# Altium PCB XPIAC_1V3.PCBDOC (part 1 of 4)
Units mil, origin at the board's own origin, x right, y up, seen from the top; angles counter-clockwise.
Board outline 2900 x 2135 mil, 6 copper layers (Top Layer, Internal Plane 1, Mid-Layer 1, Mid-Layer 2, Mid-Layer 3, Bottom Layer); 175 components, 110 nets, 675 pads, 395 vias.
Unrouted connection lines stored in the file: 142.
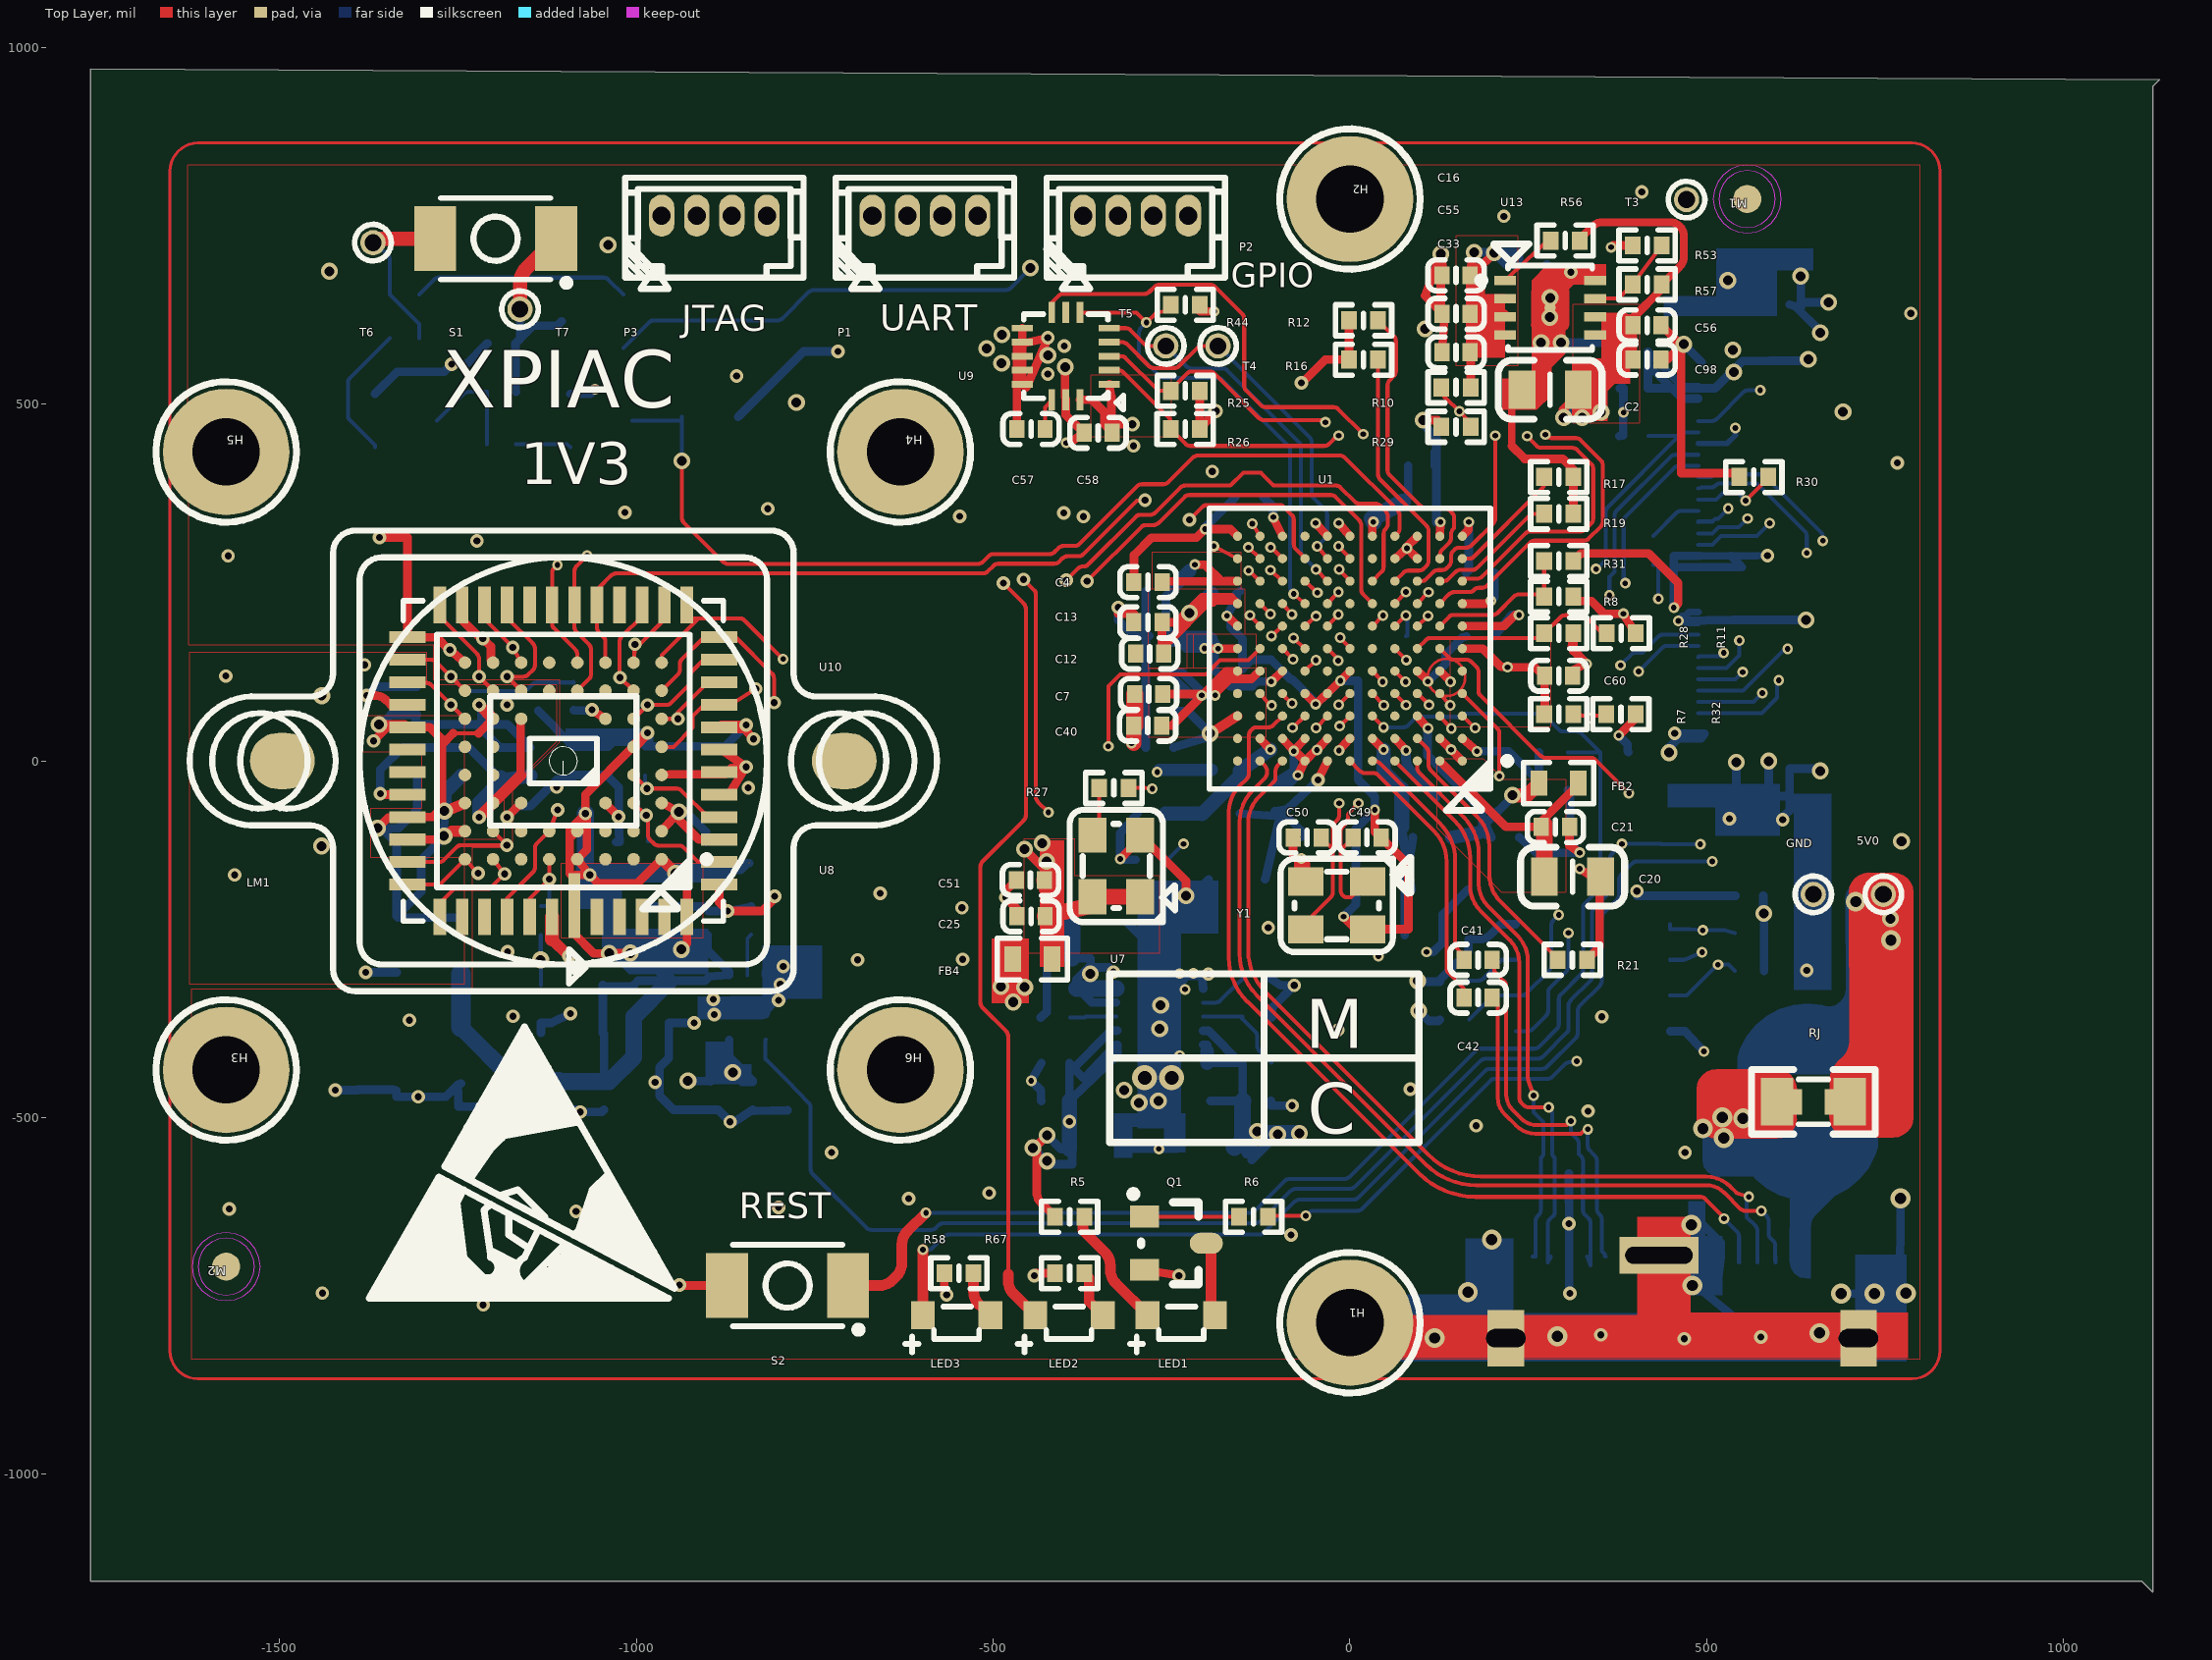
[diagram p0: Top Layer view]
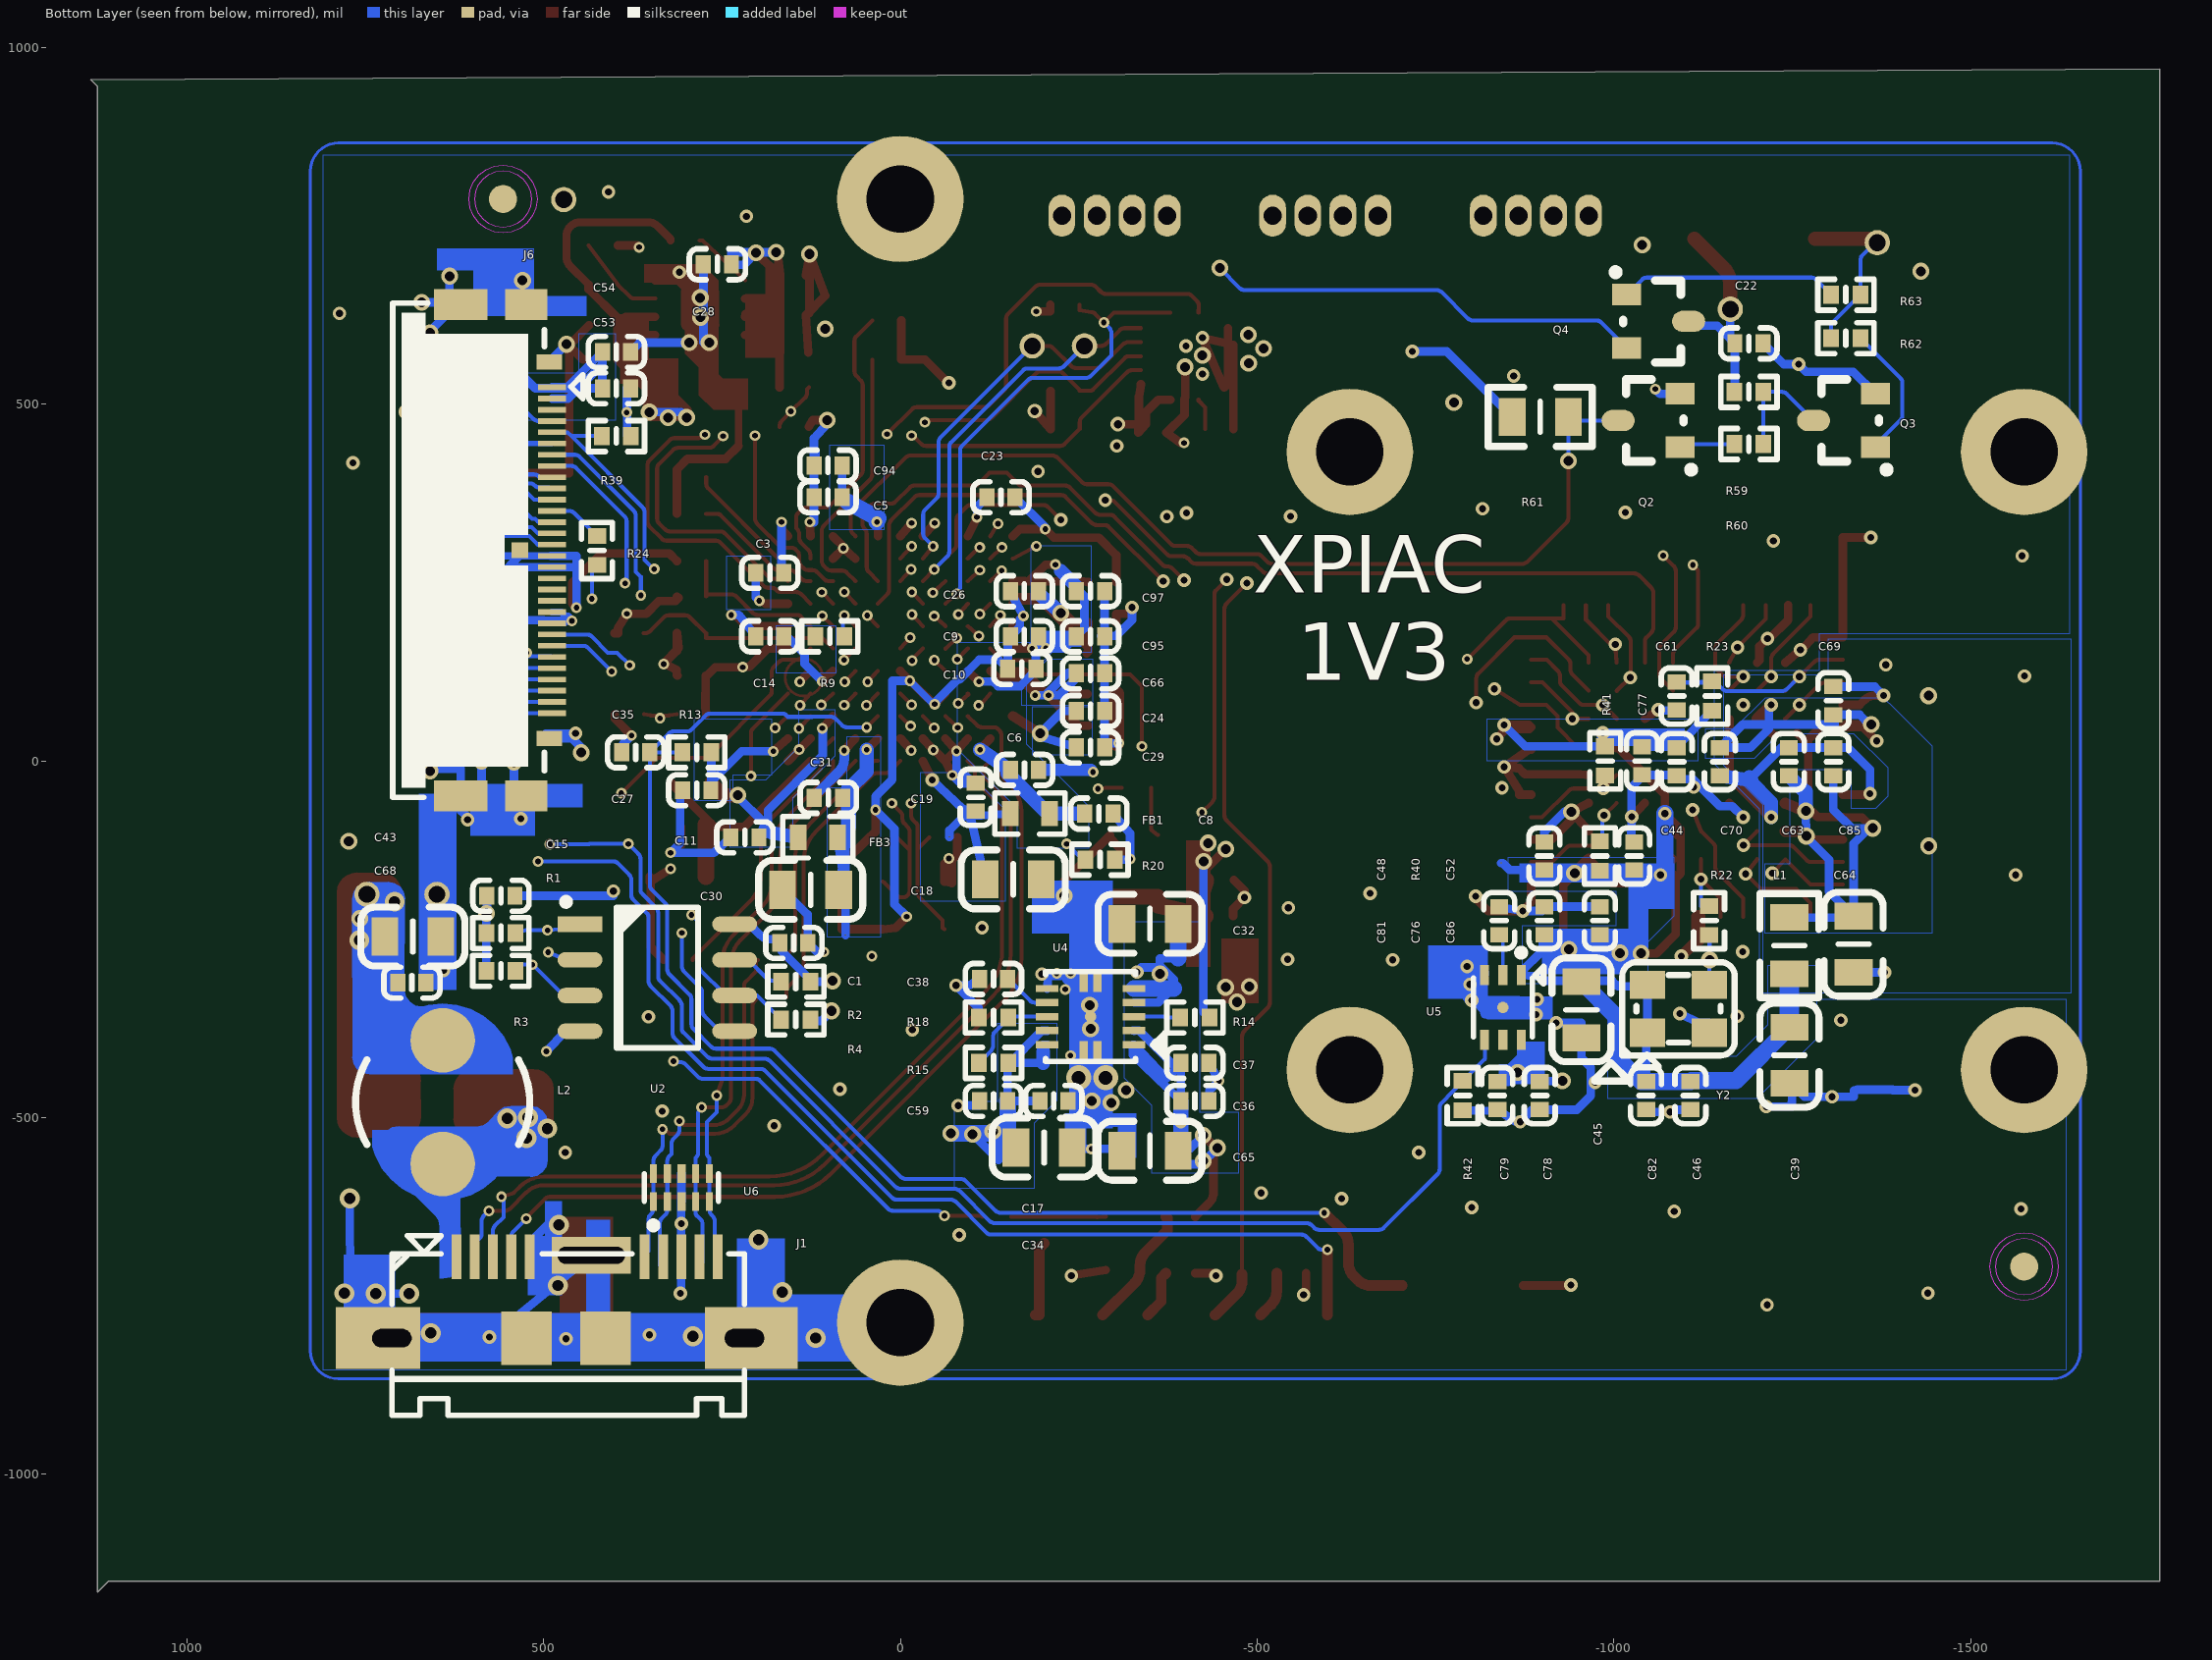
[diagram p1: Bottom Layer view, seen from below]
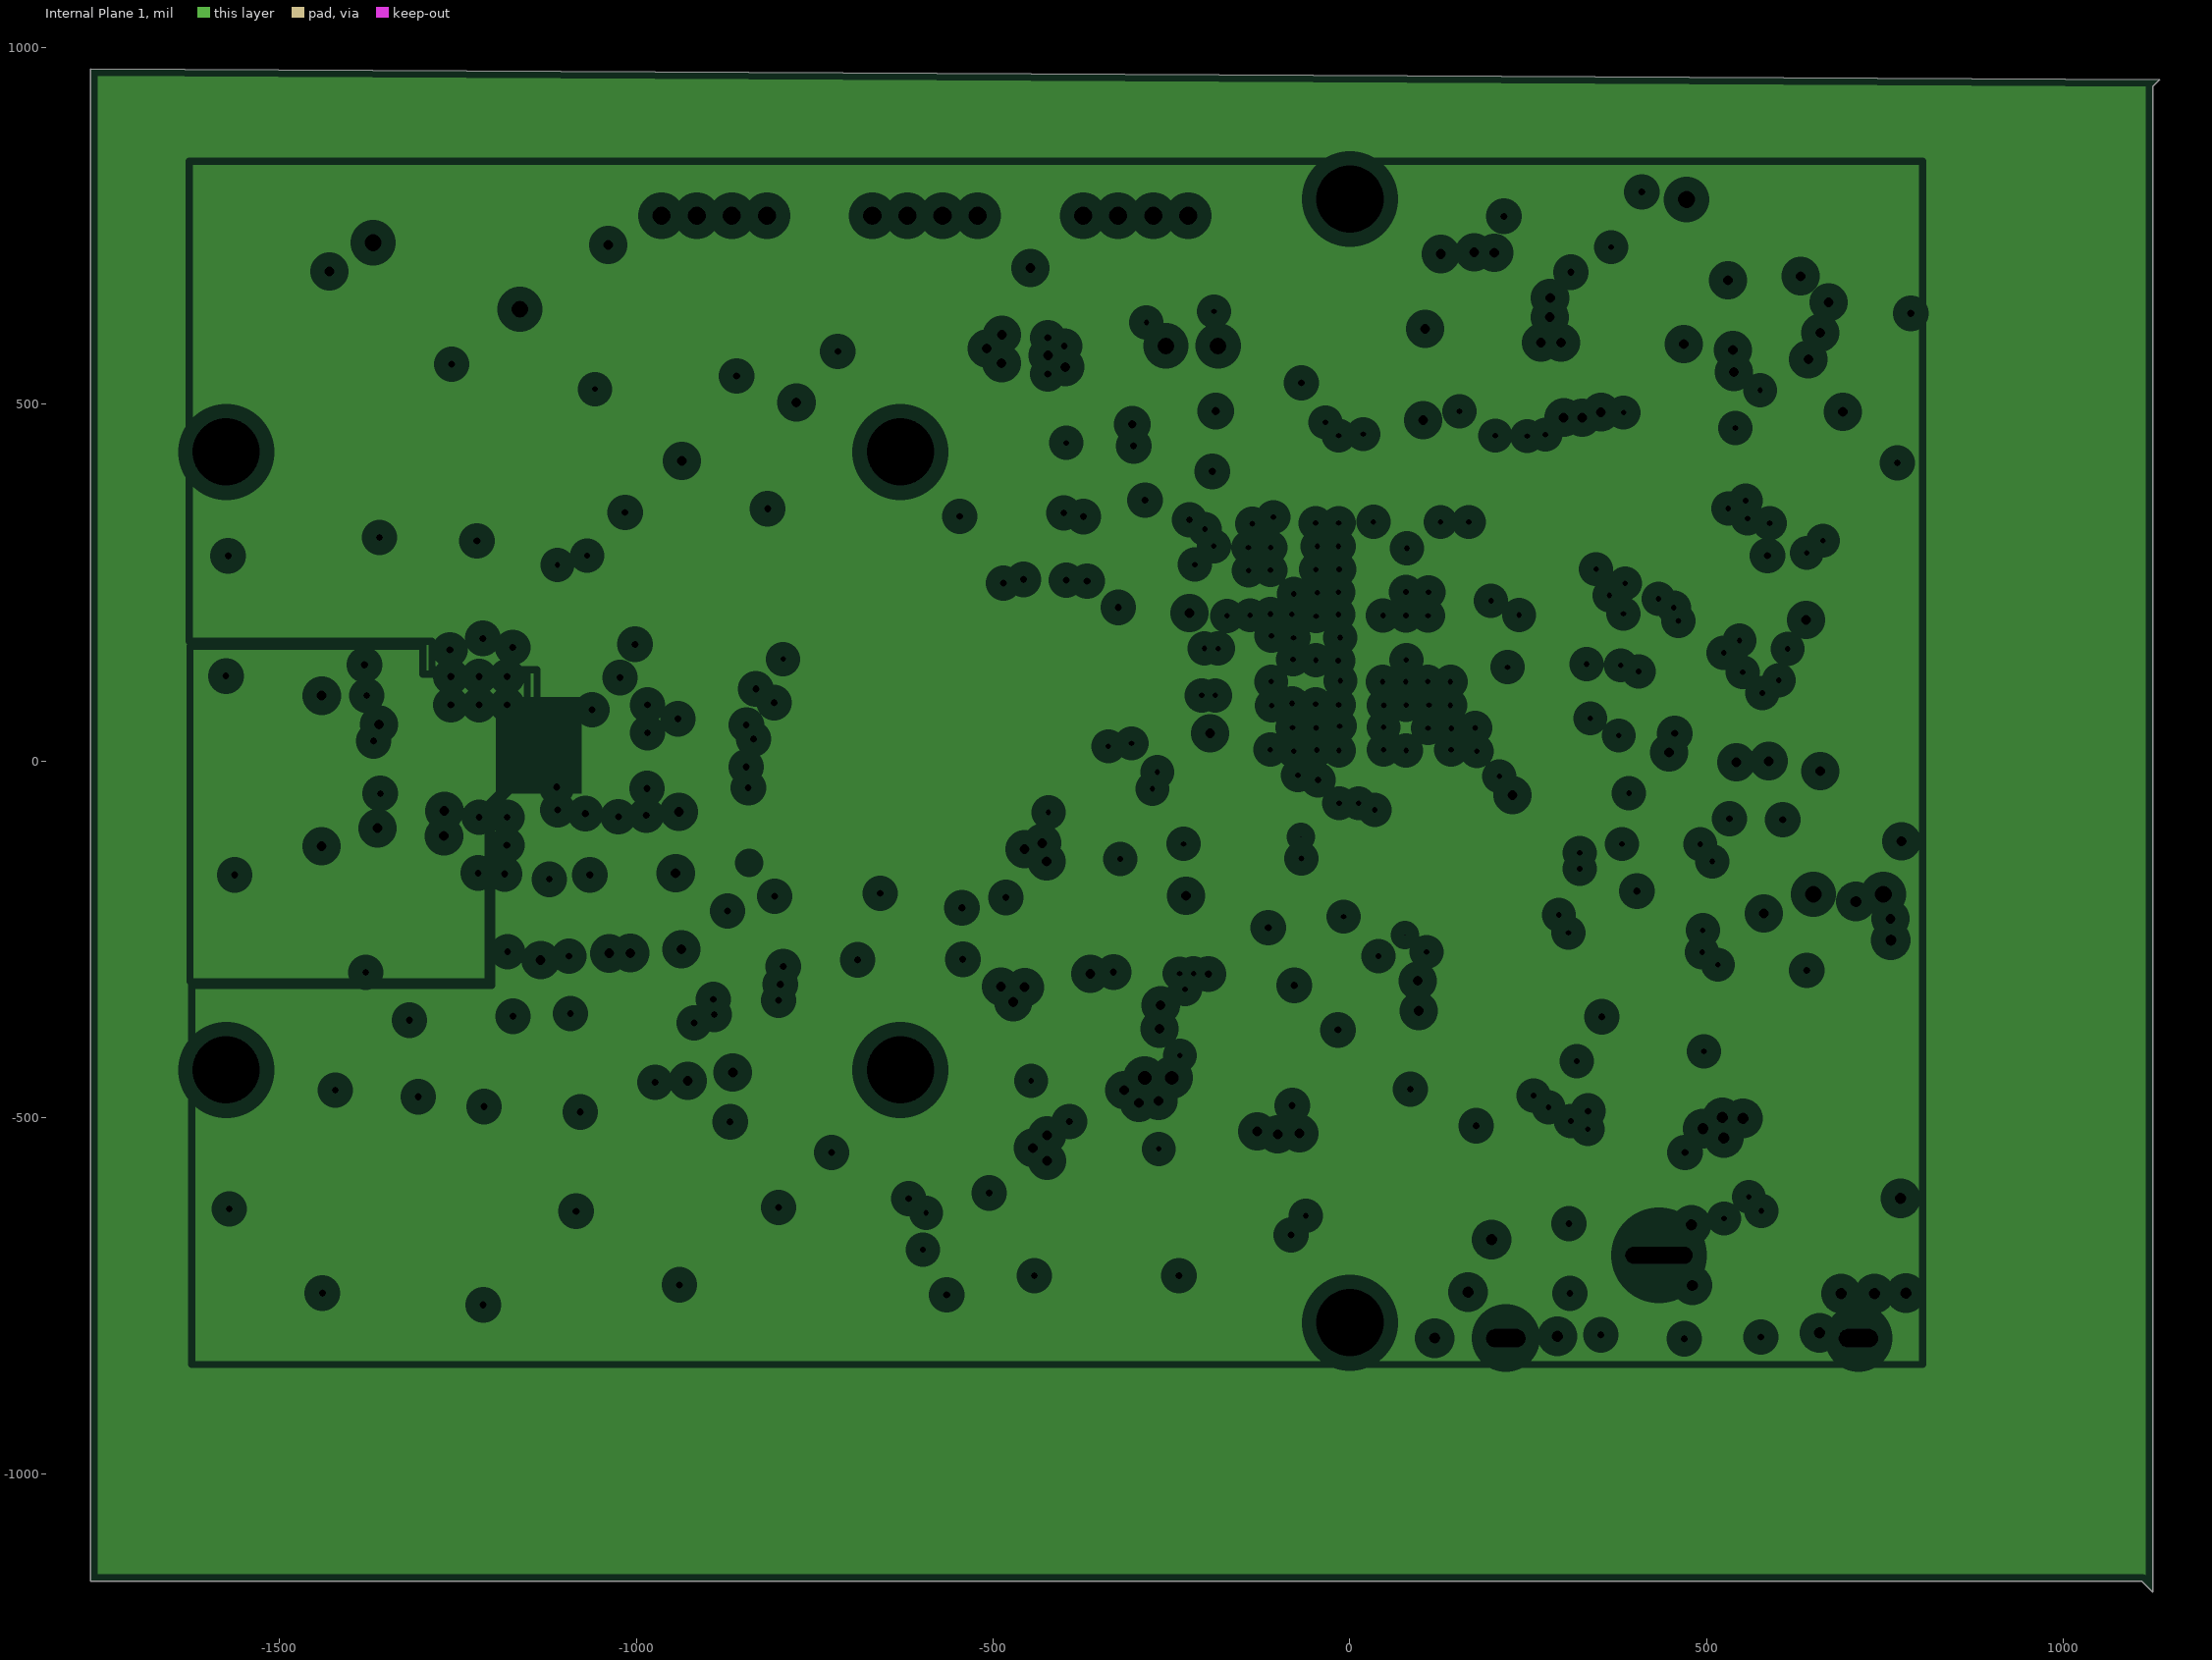
[diagram p2: Internal Plane 1, clearances drawn from the general rule]
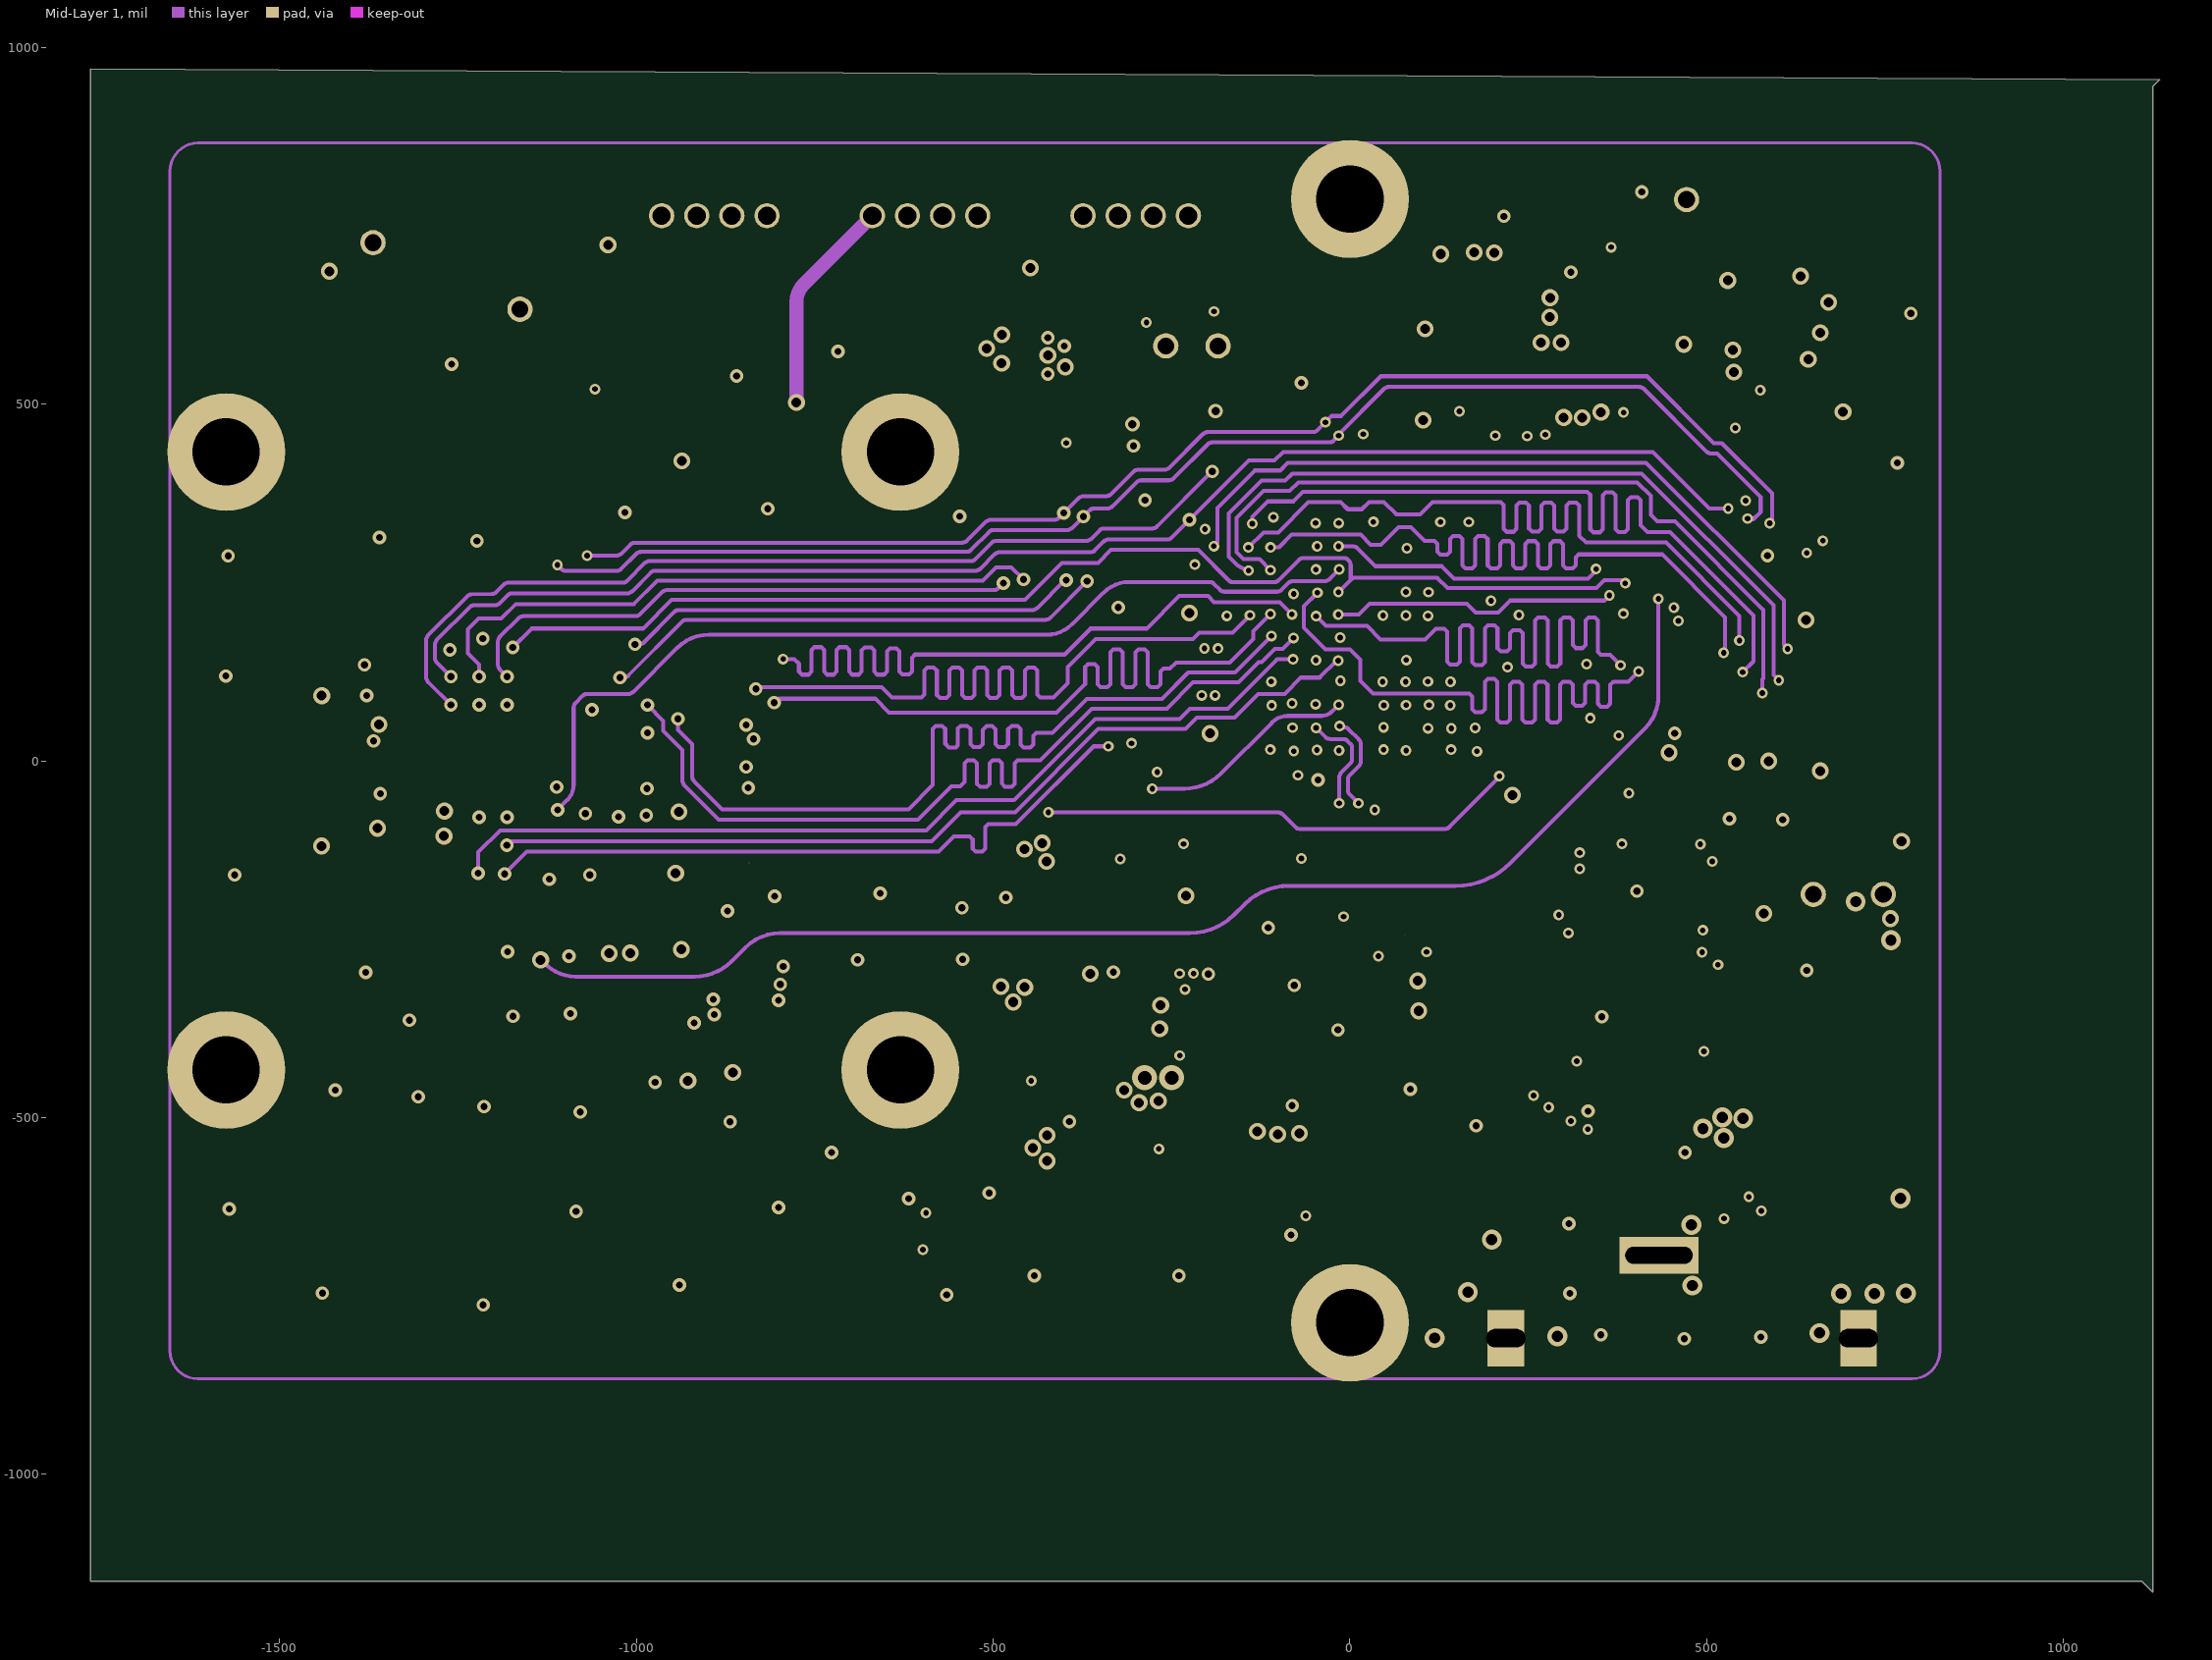
[diagram p3: Mid-Layer 1]
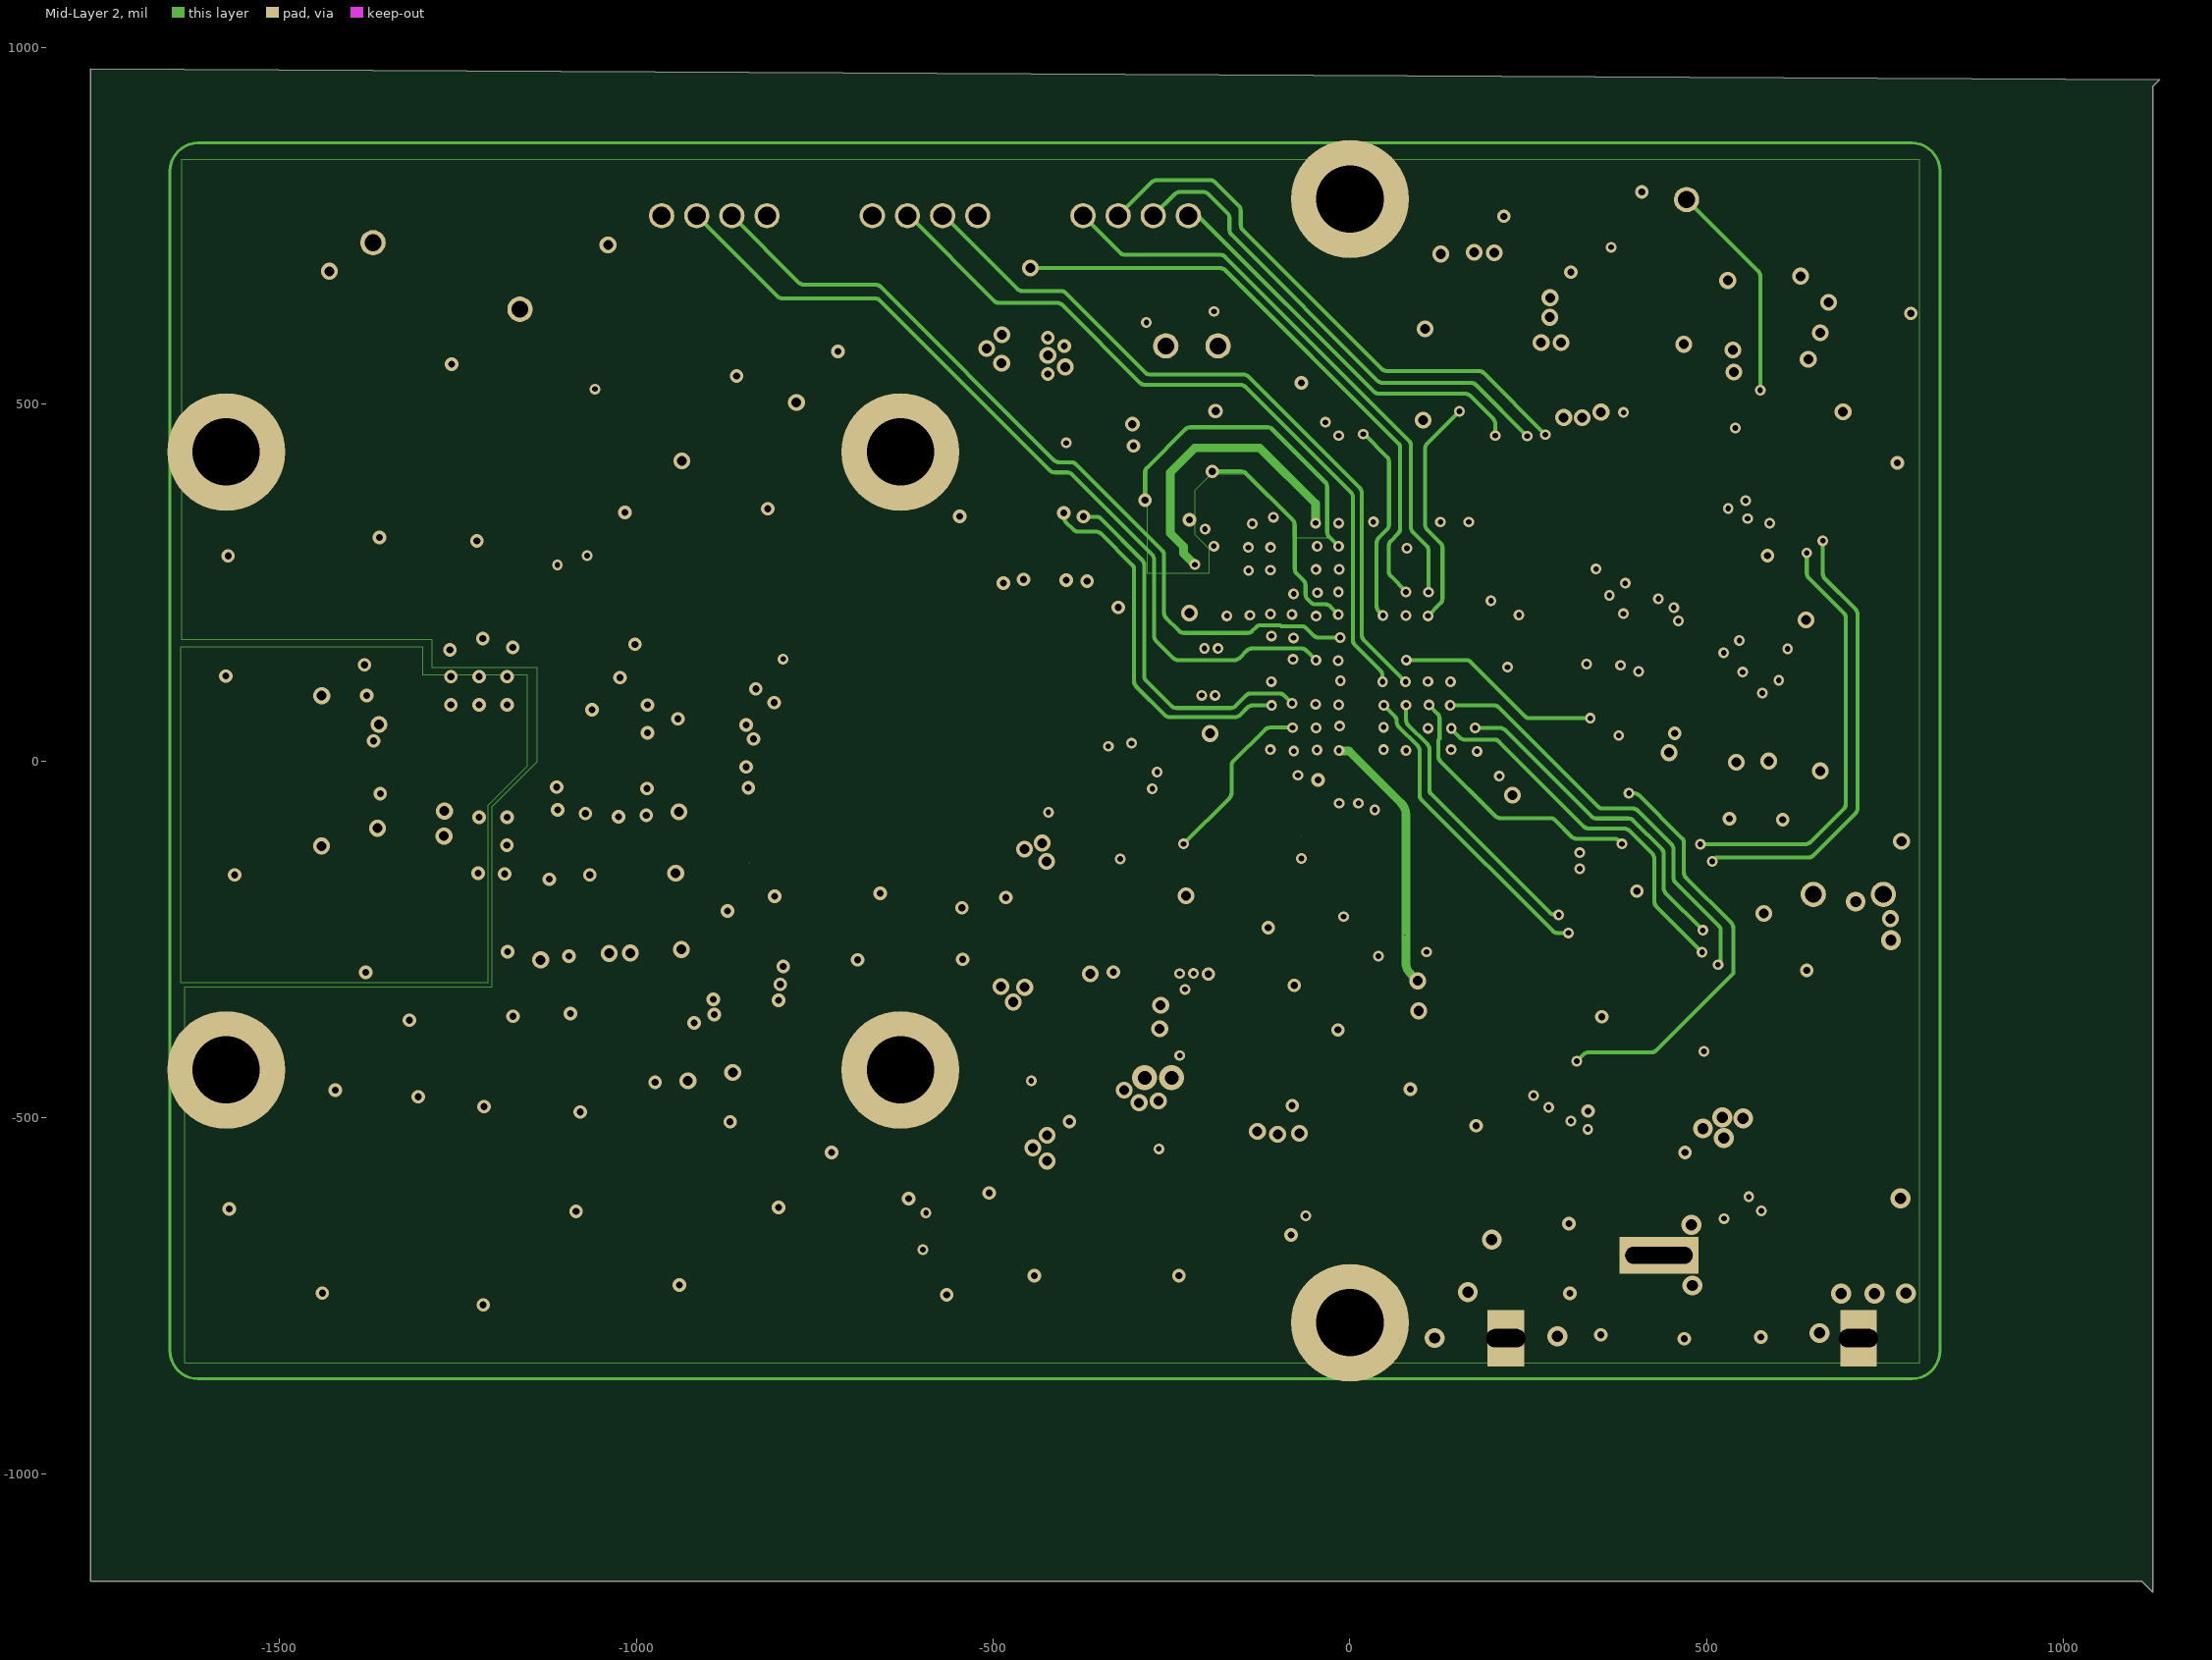
[diagram p4: Mid-Layer 2]
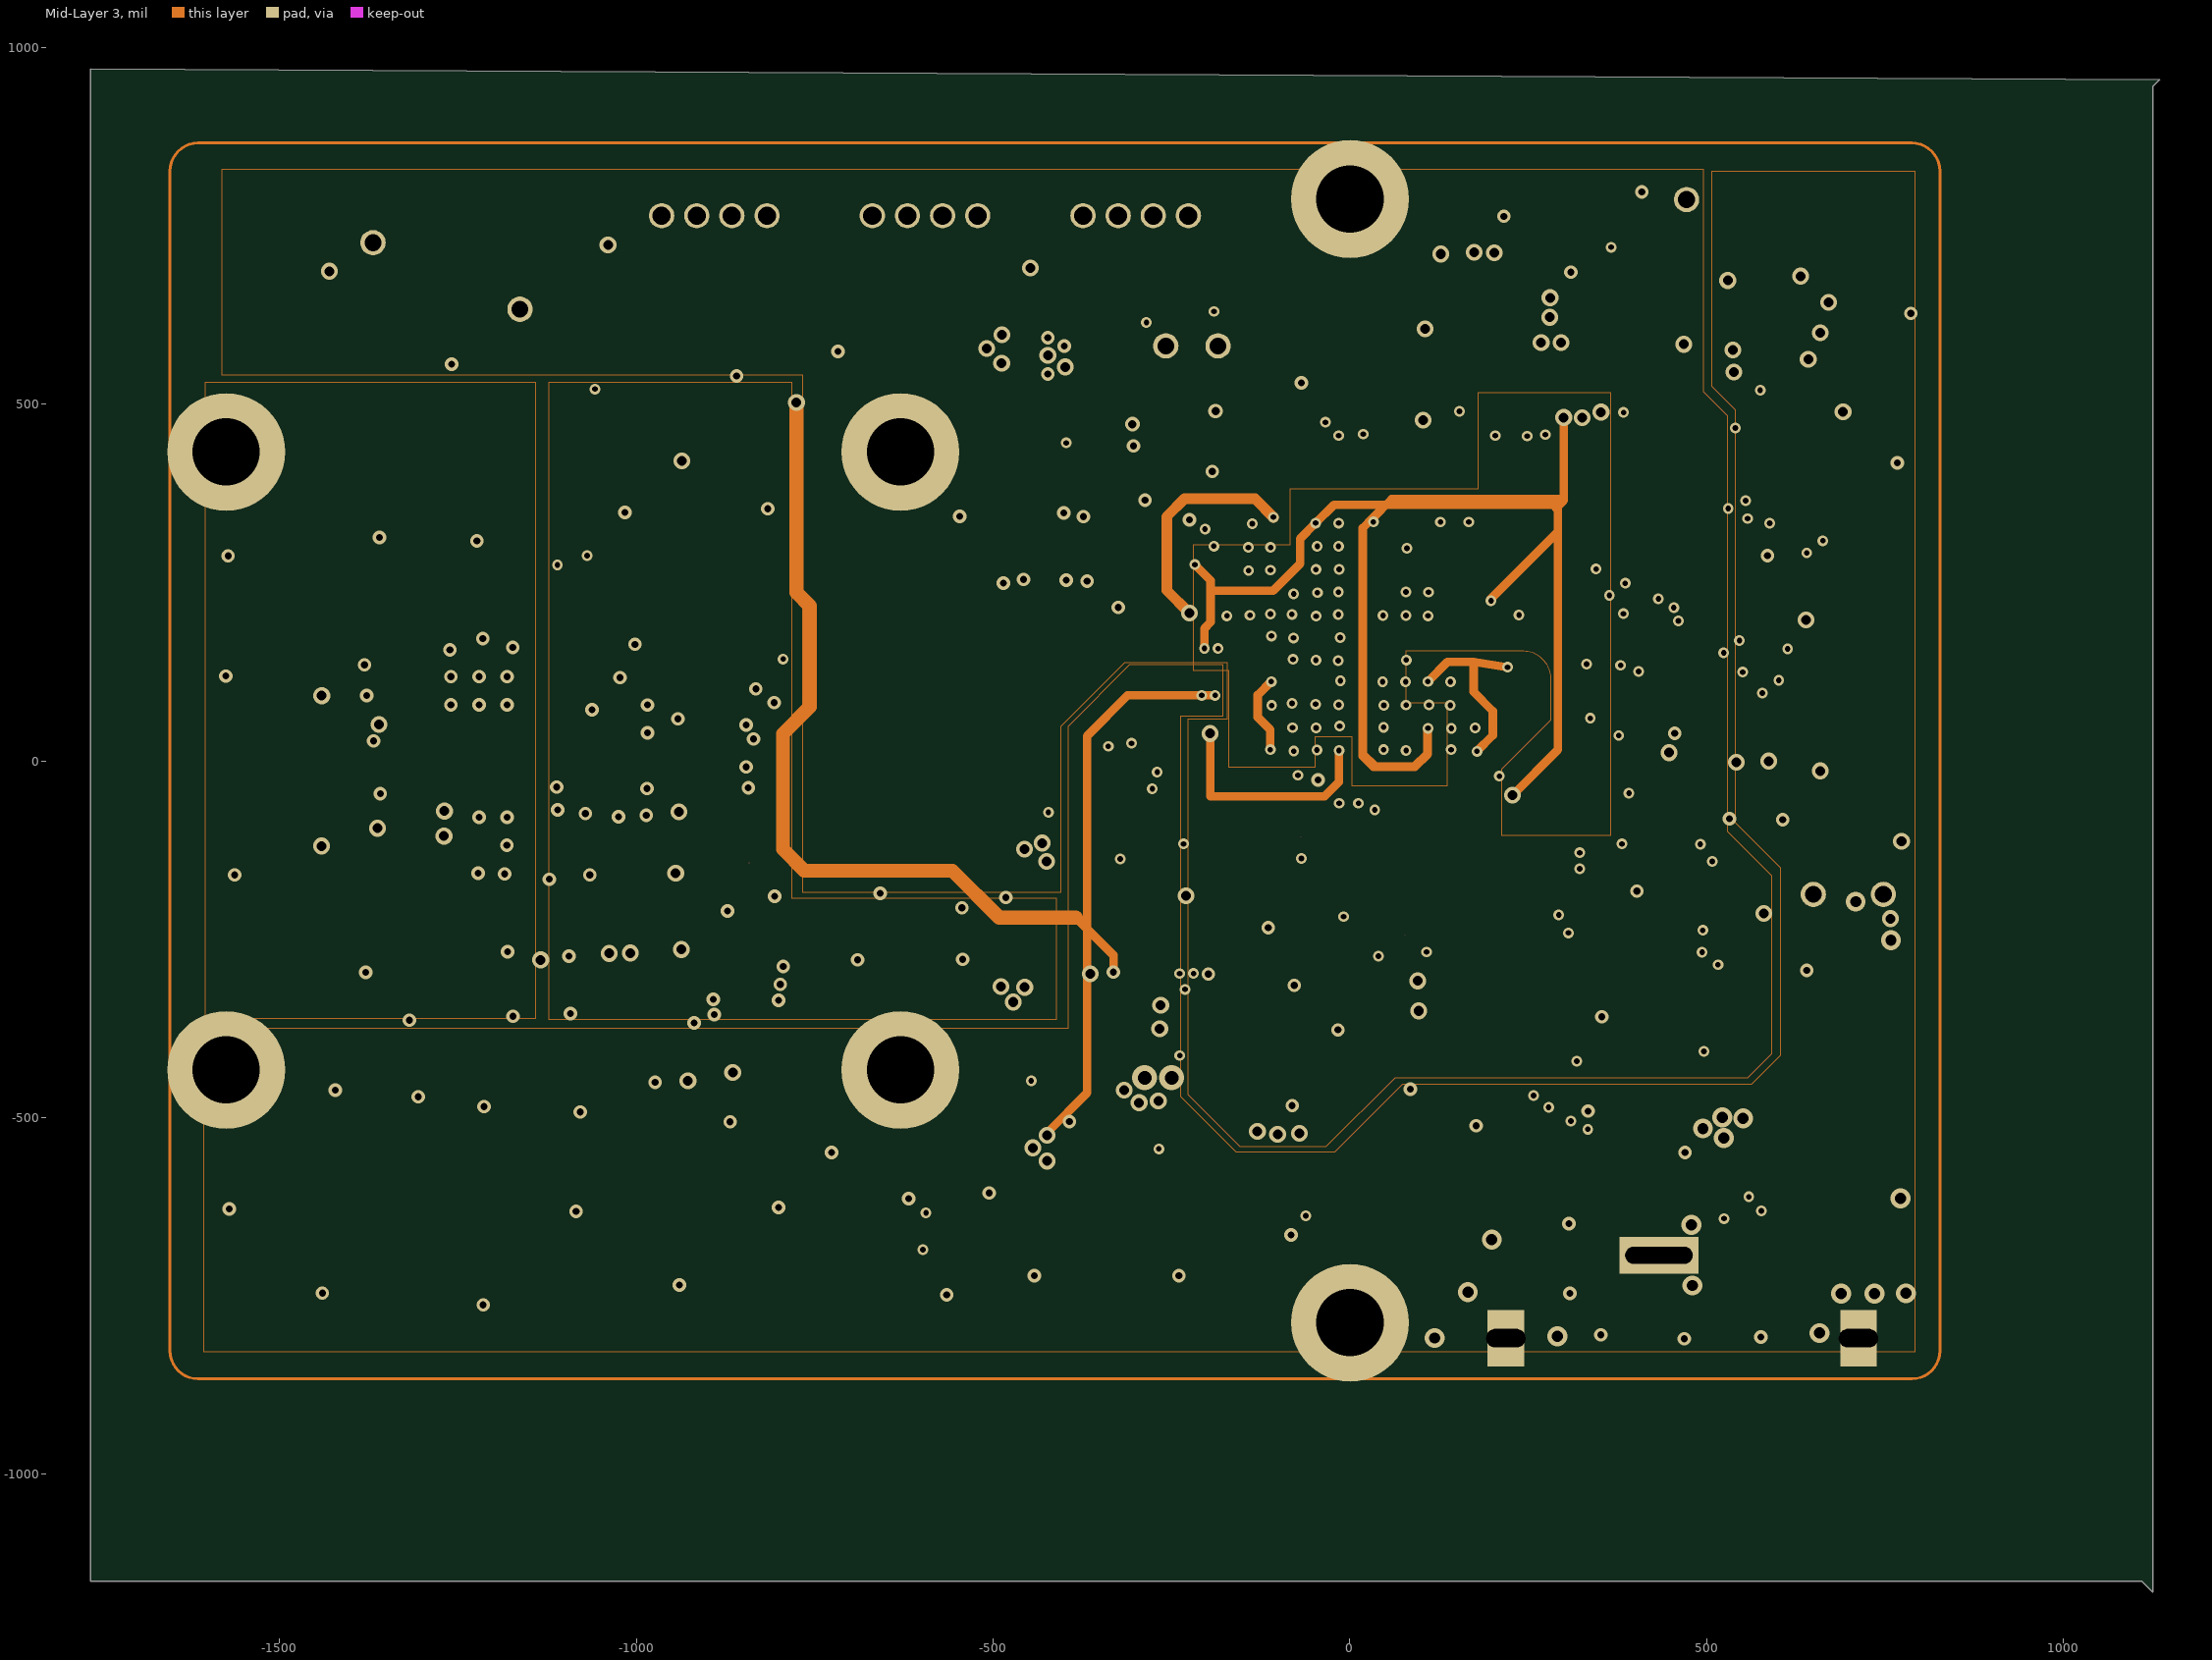
[diagram p5: Mid-Layer 3]

## Layer stack, top to bottom
Top Layer: signal copper 1.4
Dielectric: dielectric 12.6, FR-4, Dk 4.8
Internal Plane 1: plane copper 1.4
Dielectric: dielectric 12.6, FR-4, Dk 4.8
Mid-Layer 1: signal copper 1.4
Dielectric: dielectric 12.6, FR-4, Dk 4.8
Mid-Layer 2: signal copper 1.4
Dielectric: dielectric 12.6, FR-4, Dk 4.8
Mid-Layer 3: signal copper 1.4
Dielectric: dielectric 12.6, FR-4, Dk 4.8
Bottom Layer: signal copper 1.4

## Board outline
-1765,970 -1765,-1150 1110,-1150 1125,-1165 1125,945 1135,955

## Design rules (kind name [scope] priority, off if disabled: settings)
Clearance [All] p1: gap=10
PlaneClearance [All] p1: clearance=20
PlaneConnect "Power Plane Connect Style - pads with no thermal" [(Name='J6-31') Or (Name='J6-32') Or (Name='M1-1') Or (Name='M2-1') Or (Name='P3-1') Or (Name='U1-FID1') Or (Name='U1-FID2')] p1: planeconnectstyle=NoConnect reliefexpansion=20 reliefentries=4 reliefconductorwidth=10 reliefairgap=10 // PAD - No Thermal Connect Rule
PlaneConnect "Power Plane Connect Style - from global settings" [All] p2: planeconnectstyle=Relief reliefexpansion=20 reliefentries=2 reliefconductorwidth=11.81 reliefairgap=10
PolygonConnect [All] p1: connectstyle=Relief reliefconductorwidth=10 reliefentries=4 polygonreliefangle="90 Angle"
RoutingVias [All] p1: holewidth=28 width=50 viastyle="Through Hole" minholewidth=28 minwidth=50 maxholewidth=28 maxwidth=50
SilkscreenOverComponentPads [All] p1: minsilkscreentomaskgap=10
SolderMaskExpansion "Solder Mask Expansion from CAM settings" [All] p1: expansion=2
Width [All] p1: maxlimit=10 minlimit=10 preferedwidth=10
25 further rules are at their usual default settings.

## Components (designator, comment, footprint, x,y, rotation, side; value= is the part's Value field where it differs from the comment)
5V0 "PAD_TP_D1.2" PAD_TP_D1.2 747.58,-186.99 r180 top
C1 "0.1uF" 0402C_L 149.28,-255.03 r0 bottom
C2 "47u" 0805C 280.59,520.35 r180 top
C3 "0.1uF" 0402C_L 182.87,263.56 r0 bottom
C4 "0.1uF" 0402C_L -282.99,250.64 r0 top
C5 "0.1uF" 0402C_L 101.44,369.74 r180 bottom
C6 "0.1uF" 0402C_L -173.99,-12.6 r0 bottom
C7 "0.1uF" 0402C_L -282,93.74 r0 top
C8 "0.1uF" 0402C_L -278.19,-73.8 r0 bottom
C9 "0.1uF" 0402C_L -173.8,174.52 r180 bottom
C10 "0.1uF" 0402C_L -170.18,128.99 r180 bottom
C11 "0.1uF" 0402C_L 217.89,-107.03 r180 bottom
C12 "0.1uF" 0402C_L -280.56,150.34 r0 top
C13 "0.01uF" 0402C_L -282.99,194.34 r0 top
C14 "0.1uF" 0402C_L 182.87,174.71 r180 bottom
C15 "0.1uF" 0402C_L 559.81,-188.9 r0 bottom
C16 "0.01uF" 0402C_L 148.76,680.64 r0 top
C17 "0.01uF" 0402C_L -215.07,-476.51 r0 bottom
C18 "47u" 0805C -158.17,-166.02 r180 bottom
C19 "0.1uF" 0402C_L -105.6,-50.92 r270 bottom
C20 "47u" 0805C 312.01,-162.25 r0 top
C21 "0.1uF" 0402C_L 288,-92.52 r180 top
C22 "0.01uF" 0402C_L -1189.1,585.2 r0 bottom
C23 "0.1uF" 0402C_L -141,369.74 r0 bottom
C24 "0.1uF" 0402C_L -266.53,69.95 r0 bottom
C25 "4.7uF" 0402C_L -446.84,-217.63 r0 top
C26 "0.1uF" 0402C_L -173.8,238.01 r180 bottom
C27 "0.01uF" 0402C_L 285.34,-41 r180 bottom
C28 "4.7uF" 0402C_L 256.4,696.14 r180 bottom
C29 "0.1uF" 0402C_L -266.53,18.91 r0 bottom
C30 "47u" 0805C 125.68,-180.65 r0 bottom
C31 "0.1uF" 0402C_L 100.91,-51.64 r180 bottom
C32 "47uF" 0805C -349.91,-228.3 r0 bottom
C33 "0.1uF" 0402C_L 148.76,572.7 r0 top
C34 "10uF" 0805C -201.39,-541.97 r0 bottom
C35 "0.1uF" 0402C_L 370.89,12.07 r180 bottom
C36 "4.7u" 0402C_L -412.75,-476.51 r180 bottom
C37 "0.1uF" 0402C_L -412.75,-423.19 r0 bottom
C38 "NC" 0402C_L -130.48,-305.56 r180 bottom
C39 "10uF" 0805C -1245.9,-412.62 r90 bottom
C40 "0.1uF" 0402C_L -283.41,49.49 r180 top
C41 "0.1uF" 0402C_L 179.69,-278.88 r0 top
C42 "0.1uF" 0402C_L 179.69,-331.68 r0 top
C43 "10uF" 0805C 683.23,-246.16 r0 bottom
C44 "4.7uF" 0402C_L -1088.01,-1.07 r90 bottom
C45 "10uF" 0805C -954.45,-348.81 r90 bottom
C46 "0.1uF" 0402C_L -1107.11,-469.12 r90 bottom
C48 "0.1uF" 0402C_L -902.56,-133.2 r270 bottom
C49 "12pF" 0402C_L 24,-107.26 r180 top
C50 "12pF" 0402C_L -60,-107.26 r180 top
C51 "0.1uF" 0402C_L -447.65,-166.89 r0 top
C52 "4.7uF" 0402C_L -1028.36,-133.2 r270 bottom
C53 "0.1uF" 0402C_L 397.94,522.21 r0 bottom
C54 "4.7uF" 0402C_L 397.94,573.21 r0 bottom
C55 "4.7u" 0402C_L 148.76,626.67 r180 top
C56 "4.7u" 0402C_L 416.52,610.56 r0 top
C57 "0.47uF" 0402C_L -446.84,465.15 r0 top
C58 "0.1uF" 0402C_L -352.99,459.95 r0 top
C59 "0.1uF" 0402C_L -130.48,-476.51 r180 bottom
C60 "4.7uF" 0402C_L 292.64,119.41 r180 top
C61 "0.1uF" 0402C_L -1088.01,90.97 r90 bottom
C63 "4.7uF" 0402C_L -1245.14,-1.07 r270 bottom
C64 "10uF" 0805C -1335.86,-256.85 r90 bottom
C65 "10uF" 0805C -349.91,-546.32 r180 bottom
C66 "0.1uF" 0402C_L -266.53,122.78 r0 bottom
C68 "0.1uF" 0402C_L 684.54,-310.72 r0 bottom
C69 "0.1uF" 0402C_L -1307.51,84.5 r270 bottom
C70 "4.7uF" 0402C_L -1148.35,-1.07 r90 bottom
C76 "4.7u" 0402C_L -902.56,-223.88 r90 bottom
C77 "0.1uF" 0402C_L -1039.44,0 r90 bottom
C78 "0.1uF" 0402C_L -896.1,-469.12 r90 bottom
C79 "1uF" 0402C_L -836.63,-469.12 r90 bottom
C81 "0.01uF" 0402C_L -839.24,-223.88 r270 bottom
C82 "0.1uF" 0402C_L -1045.08,-469.12 r90 bottom
C85 "1nF" 0402C_L -1307.51,-1.07 r270 bottom
C86 "0.1uF" 0402C_L -980.26,-223.88 r270 bottom
C94 "0.01uF" 0402C_L 101.44,414.12 r180 bottom
C95 "0.01uF" 0402C_L -266.53,174.52 r0 bottom
C97 "0.01uF" 0402C_L -266.53,238.01 r0 bottom
C98 "0.01uF" 0402C_L 416.52,562.56 r180 top
FB1 "600@100MHz" 0603R -181.71,-73.8 r180 bottom
FB2 "600@100MHz" 0603R 292.44,-31.16 r180 top
FB3 "600@100MHz" 0603R 115.79,-107.03 r0 bottom
FB4 "600@100MHz" 0603R -445.2,-277.67 r0 top
GND "PAD_TP_D1.2" PAD_TP_D1.2 649.46,-186.99 r180 top
H1 "CON1" PAD_M3_D350_450 0.12,-787.39 r180 top
H2 "CON1" PAD_M3_D350_450 0.12,787.55 r180 top
H3 "CON1" PAD_M3_D350_450 -1574.8,-433.07 r180 top
H4 "CON1" PAD_M3_D350_450 -629.92,433.07 r180 top
H5 "CON1" PAD_M3_D350_450 -1574.8,433.07 r180 top
H6 "CON1" PAD_M3_D350_450 -629.92,-433.07 r180 top
J1 "USB3_MICROB" USB3_P65L130W51H28_TH 570.87,-866.14 r180 bottom
J6 "20525-030E-02C" HSA30_P40L196W42H10_20525 551.18,295.28 r270 bottom
L1 "10uH" 0805R -1245.82,-258.82 r90 bottom
L2 "10uH_2A" IND_P2.5D6H4.8 641.37,-478.32 r90 bottom
LED1 "LED0805" LED0805A_L210W100H60 -236.24,-776.68 r180 top
LED2 "LED0805" LED0805A_L210W100H60 -393.7,-776.68 r180 top
LED3 "LED0805" LED0805A_L210W100H60 -551.18,-776.68 r180 top
LM1 "CMT821_20" LEMS_P20_M12 -1102.36,0 r180 top
M1 "PAD_MARK_D1-2" PAD_MARK_D1-2 556.75,787.67 r180 top
M2 "PAD_MARK_D1-2" PAD_MARK_D1-2 -1574.8,-708.66 r180 top
P1 "UART" WAFER4_P1.25L6.25W3.4H4.3 -669.29,764.21 r0 top
P2 "GPIO" WAFER4_P1.25L6.25W3.4H4.3 -374.02,764.21 r0 top
P3 "JTAG" WAFER4_P1.25L6.25W3.4H4.3 -964.57,764.21 r0 top
Q1 "BC817" SOT-23L -246.49,-675.97 r0 top
Q2 "BC817" SOT-23L -1051.15,477.1 r0 bottom
Q3 "BC817" SOT-23L -1325,477.1 r0 bottom
Q4 "BC817" SOT-23L -1059.38,616.08 r180 bottom
R1 "4.7K" 0402R_L 559.81,-241.26 r180 bottom
R2 "4.7K" 0402R_L 146.51,-309.35 r180 bottom
R3 "4.7K" 0402R_L 559.81,-294.24 r180 bottom
R4 "100K" 0402R_L 146.51,-362.55 r0 bottom
R5 "1K" 0402R_L -392.76,-638.96 r0 top
R6 "200R" 0402R_L -135.06,-638.96 r180 top
R7 "4.7K" 0402R_L 292.64,65.57 r180 top
R8 "4.7K" 0402R_L 292.64,230.37 r0 top
R9 "10K" 0402R_L 98.87,174.71 r180 bottom
R10 "4.7K" 0402R_L 148.76,523.52 r0 top
R11 "4.7K" 0402R_L 380.31,179.18 r0 top
R12 "4.7K" 0402R_L 19.05,617.51 r180 top
R13 "100K" 0402R_L 285.34,12.07 r0 bottom
R14 "1K" 0402R_L -412.75,-359.56 r0 bottom
R15 "4.7K" 0402R_L -130.48,-423.19 r0 bottom
R16 "4.7K" 0402R_L 19.05,562.41 r180 top
R17 "4.7K" 0402R_L 292.64,398 r0 top
R18 "1.5K" 0402R_L -130.48,-359.56 r0 bottom
R19 "4.7K" 0402R_L 292.64,346.42 r0 top
R20 "6.04K" 0402R_L -279.76,-138.31 r180 bottom
R21 "200R" 0402R_L 311.72,-278.88 r0 top
R22 "0R" 0402R_L -1133.41,-223.88 r270 bottom
R23 "10K" 0402R_L -1137.64,90.97 r270 bottom
R24 "22R" 0402R_L 425.08,294.87 r270 bottom
R25 "2.2K" 0402R_L -230.69,518.71 r180 top
R26 "2.2K" 0402R_L -230.83,465.15 r180 top
R27 "22R" 0402R_L -330.82,-37.86 r180 top
R28 "4.7K" 0402R_L 292.64,179.18 r0 top
R29 "4.7K" 0402R_L 148.76,468.3 r180 top
R30 "0R" 0402R_L 566.02,398 r180 top
R31 "4.7K" 0402R_L 292.64,280.21 r0 top
R32 "4.7K" 0402R_L 379.73,65.57 r0 top
R39 "10K" 0402R_L 397.94,455.41 r180 bottom
R40 "10K" 0402R_L -980.26,-133.2 r270 bottom
R41 "10K" 0402R_L -987.66,0 r90 bottom
R42 "10K" 0402R_L -788.1,-469.12 r270 bottom
R44 "10K" 0402R_L -230.69,639.23 r0 top
R53 "30.1K" 0402R_L 416.52,722.52 r180 top
R56 "100K" 0402R_L 301.63,729.28 r180 top
R57 "0R" 0402R_L 416.52,667.75 r180 top
R58 "1K" 0402R_L -547.92,-717.91 r0 top
R59 "1K" 0402R_L -1189.1,517.25 r0 bottom
R60 "22R" 0402R_L -1189.1,444.16 r180 bottom
R61 "NC" 0805R -896.72,482.25 r180 bottom
R62 "1k" 0402R_L -1325,592.41 r180 bottom
R63 "1k" 0402R_L -1325,653.5 r0 bottom
R67 "1K" 0402R_L -392.76,-717.91 r0 top
RJ "1206R-0603" 1206R-0603 649.52,-477.81 r0 top
S1 "RL" SW_L40W30H25_MPTFP -1197.26,731.97 r180 top
S2 "Reset" SW_L40W30H25_MPTFP -788.03,-735.34 r180 top
T3 "CON1" PAD_TP_D1.2 471.77,786.79 r180 top
T4 "CON1" PAD_TP_D1.2 -184.75,581.7 r180 top
T5 "CON1" PAD_TP_D1.2 -258.07,581.7 r180 top
T6 "CON1" PAD_TP_D1.2 -1369.12,726.43 r0 top
T7 "CON1" PAD_TP_D1.2 -1163.07,633.11 r180 top
U1 "CYUSB3014" FBGA121_P80L100W100H11 0,157.48 r180 top
U2 "M25P40-VMN3TPB" SO8N_P127L50W40W62H17 340.63,-303.75 r180 bottom
U4 "TPS74801DRCR" SON10_P50L32W32H10_DRC -266.52,-358.36 r0 bottom
U5 "TPS73533" SON6_P65L21W21H8_DRV -844.38,-345.53 r270 bottom
U6 "SP3010-04UTG" UDFN10_SON_P50L25W10H55 306.84,-597.85 r90 bottom
U7 "XTAL-3225" XTAL_3225 -327.44,-147.21 r90 top
U8 "MT9V024IA7XTM" IBGA52_8X8_P100L90W90H90R -1102.36,0 r180 top
U9 "ICM-20608-G" LGA16_P50L30W30H08 -398.15,567.3 r180 top
U10 "CLCC48_P80L114W114H23" CLCC48_P80L114W114H23 -1102.36,0 r180 top
U13 "AS1364-BTDT-AD" TDFN8_P65L30W30H08 280.59,635.22 r0 top
Y1 "19.2MHz--3225" XTAL_3225A -18.5,-202.46 r180 top
Y2 "HSO531S_3225 27Mhz" XTAL_3225 -1090.43,-347.48 r180 bottom

## Footprints (in the part's own frame and the unit in brackets; to place one, negate y for a bottom-side part, rotate by r counter-clockwise, add the part's x,y. Pads: shape width x height; smd on the part's side, far side on the other; paste and mask are expansions set on the pad)
0402C_L [mm]
  rect 0.54x0.64 smd: 1(-0.5,0) 2(0.5,0)
  silkscreen extent -1,-0.55 1,0.55
0402R_L [mm]
  rect 0.56x0.64 smd: 1(-0.52,0) 2(0.52,0)
  silkscreen extent -1,-0.55 1,0.55
0603R [mm]
  rect 0.6x0.9 smd: 1(-0.7,0) 2(0.7,0)
  silkscreen extent -1.25,-0.74 1.25,0.74
0805C [mm]
  rect 0.95x1.35 smd: 1(-1,0) 2(1,0)
  silkscreen extent -1.85,-1.05 1.85,1.05
0805R [mm]
  rect 0.95x1.35 smd: 1(-1,0) 2(1,0)
  silkscreen extent -1.85,-1.05 1.85,1.05
1206R-0603 [mm]
  rect 1.15x1.7 smd: 1(-1.3,0) 2(1.3,0)
  rect 0.6x0.9 smd: 3(-0.7,0) 4(0.7,0)
  silkscreen extent -2.2,-1.15 2.2,1.15
CLCC48_P80L114W114H23 [mm]
  rect 0.42x2.3 smd: 1(-0.4,5.15)
  rect 0.45x1.3 smd paste-0.015: 2(-1.2,5.55) 3(-2,5.55) 4(-2.8,5.55) 5(-3.6,5.55) 6(-4.4,5.55) 19(-4.4,-5.55) 20(-3.6,-5.55) 21(-2.8,-5.55) 22(-2,-5.55) 23(-1.2,-5.55) 24(-0.4,-5.55) 25(0.4,-5.55) 26(1.2,-5.55) 27(2,-5.55) 28(2.8,-5.55) 29(3.6,-5.55) 30(4.4,-5.55) 43(4.4,5.55) 44(3.6,5.55) 45(2.8,5.55) 46(2,5.55) 47(1.2,5.55) 48(0.4,5.55)
  rect 1.3x0.42 smd: 7(-5.55,4.4) 8(-5.55,3.6) 9(-5.55,2.8) 10(-5.55,2) 11(-5.55,1.2) 12(-5.55,0.4) 13(-5.55,-0.4) 14(-5.55,-1.2) 15(-5.55,-2) 16(-5.55,-2.8) 17(-5.55,-3.6) 18(-5.55,-4.4) 31(5.55,-4.4) 32(5.55,-3.6) 33(5.55,-2.8) 34(5.55,-2) 35(5.55,-1.2) 36(5.55,-0.4) 37(5.55,0.4) 38(5.55,1.2) 39(5.55,2) 40(5.55,2.8) 41(5.55,3.6) 42(5.55,4.4)
  silkscreen extent -5.7,-5.7 5.7,7.92
FBGA121_P80L100W100H11 [mm]
  round 0.33 smd: A1(-4,4) A2(-3.2,4) A3(-2.4,4) A4(-1.6,4) A5(-0.8,4) A6(0,4) A7(0.8,4) A8(1.6,4) A9(2.4,4) A10(3.2,4) A11(4,4) B1(-4,3.2) B2(-3.2,3.2) B3(-2.4,3.2) B4(-1.6,3.2) B5(-0.8,3.2) B6(0,3.2) B7(0.8,3.2) B8(1.6,3.2) B9(2.4,3.2) B10(3.2,3.2) B11(4,3.2) C1(-4,2.4) C2(-3.2,2.4) C3(-2.4,2.4) C4(-1.6,2.4) C5(-0.8,2.4) C6(0,2.4) C7(0.8,2.4) C8(1.6,2.4) C9(2.4,2.4) C10(3.2,2.4) C11(4,2.4) D1(-4,1.6) D2(-3.2,1.6) D3(-2.4,1.6) D4(-1.6,1.6) D5(-0.8,1.6) D6(0,1.6) D7(0.8,1.6) D8(1.6,1.6) D9(2.4,1.6) D10(3.2,1.6) D11(4,1.6) E1(-4,0.8) E2(-3.2,0.8) E3(-2.4,0.8) E4(-1.6,0.8) E5(-0.8,0.8) E6(0,0.8) E7(0.8,0.8) E8(1.6,0.8) E9(2.4,0.8) E10(3.2,0.8) E11(4,0.8) F1(-4,0) F2(-3.2,0) F3(-2.4,0) F4(-1.6,0) F5(-0.8,0) F6(0,0) F7(0.8,0) F8(1.6,0) F9(2.4,0) F10(3.2,0) F11(4,0) G1(-4,-0.8) G2(-3.2,-0.8) G3(-2.4,-0.8) G4(-1.6,-0.8) G5(-0.8,-0.8) G6(0,-0.8) G7(0.8,-0.8) G8(1.6,-0.8) G9(2.4,-0.8) G10(3.2,-0.8) G11(4,-0.8) H1(-4,-1.6) H2(-3.2,-1.6) H3(-2.4,-1.6) H4(-1.6,-1.6) H5(-0.8,-1.6) H6(0,-1.6) H7(0.8,-1.6) H8(1.6,-1.6) H9(2.4,-1.6) H10(3.2,-1.6) H11(4,-1.6) J1(-4,-2.4) J2(-3.2,-2.4) J3(-2.4,-2.4) J4(-1.6,-2.4) J5(-0.8,-2.4) J6(0,-2.4) J7(0.8,-2.4) J8(1.6,-2.4) J9(2.4,-2.4) J10(3.2,-2.4) J11(4,-2.4) K1(-4,-3.2) K2(-3.2,-3.2) K3(-2.4,-3.2) K4(-1.6,-3.2) K5(-0.8,-3.2) K6(0,-3.2) K7(0.8,-3.2) K8(1.6,-3.2) K9(2.4,-3.2) K10(3.2,-3.2) K11(4,-3.2) L1(-4,-4) L2(-3.2,-4) L3(-2.4,-4) L4(-1.6,-4) L5(-0.8,-4) L6(0,-4) L7(0.8,-4) L8(1.6,-4) L9(2.4,-4) L10(3.2,-4) L11(4,-4)
  round 1 on Mech16: FID1(-5.85,-5.85) FID2(5.85,5.85)
  silkscreen extent -5.72,-5 5,5
HSA30_P40L196W42H10_20525 [mm]
  rect 0.2x0.98 smd: 1(-5.8,1.6) 2(-5.4,1.6) 3(-5,1.6) 4(-4.6,1.6) 5(-4.2,1.6) 6(-3.8,1.6) 7(-3.4,1.6) 8(-3,1.6) 9(-2.6,1.6) 10(-2.2,1.6) 11(-1.8,1.6) 12(-1.4,1.6) 13(-1,1.6) 14(-0.6,1.6) 15(-0.2,1.6) 16(0.2,1.6) 17(0.6,1.6) 18(1,1.6) 19(1.4,1.6) 20(1.8,1.6) 21(2.2,1.6) 22(2.6,1.6) 23(3,1.6) 24(3.4,1.6) 25(3.8,1.6) 26(4.2,1.6) 27(4.6,1.6) 28(5,1.6) 29(5.4,1.6) 30(5.8,1.6)
  round 0 all layers, no hole: 31(-7.45,0) 32(7.45,0)
  rect 1.1x1.5 smd: 33(-8.75,0.68) 34(8.75,0.68)
  rect 1.1x1.9 smd: 35(8.75,-1.65) 36(-8.75,-1.65)
  rect 0.55x0.9 smd: 37(-6.7,1.5) 38(6.7,1.5)
  rect 0.55x0.6 smd: 39(0,0.45)
  silkscreen extent -8.8,-4.07 8.8,2.7
IBGA52_8X8_P100L90W90H90R [mm]
  round 0.45 smd: A1(-3.5,3.5) A2(-2.5,3.5) A3(-1.5,3.5) A4(-0.5,3.5) A5(0.5,3.5) A6(1.5,3.5) A7(2.5,3.5) A8(3.5,3.5) B1(-3.5,2.5) B2(-2.5,2.5) B3(-1.5,2.5) B4(-0.5,2.5) B5(0.5,2.5) B6(1.5,2.5) B7(2.5,2.5) B8(3.5,2.5) C1(-3.5,1.5) C2(-2.5,1.5) C3(-1.5,1.5) C6(1.5,1.5) C7(2.5,1.5) C8(3.5,1.5) D1(-3.5,0.5) D2(-2.5,0.5) D7(2.5,0.5) D8(3.5,0.5) E1(-3.5,-0.5) E2(-2.5,-0.5) E7(2.5,-0.5) E8(3.5,-0.5) F1(-3.5,-1.5) F2(-2.5,-1.5) F3(-1.5,-1.5) F6(1.5,-1.5) F7(2.5,-1.5) F8(3.5,-1.5) G1(-3.5,-2.5) G2(-2.5,-2.5) G3(-1.5,-2.5) G4(-0.5,-2.5) G5(0.5,-2.5) G6(1.5,-2.5) G7(2.5,-2.5) G8(3.5,-2.5) H1(-3.5,-3.5) H2(-2.5,-3.5) H3(-1.5,-3.5) H4(-0.5,-3.5) H5(0.5,-3.5) H6(1.5,-3.5) H7(2.5,-3.5) H8(3.5,-3.5)
  silkscreen extent -5.23,-4.5 4.5,4.5
IND_P2.5D6H4.8 [mm]
  round 2.3 smd: 1(-2.2,0) 2(2.2,0)
  Top Layer region: -1,2.5 -1,-2.5 -1.601,-2.5 -1.905,-2.408 -2.356,-2.167 -2.751,-1.843 -3.075,-1.448 -3.316,-0.997 -3.464,-0.509 -3.514,0 -3.464,0.509 -3.316,0.997 -3.075,1.448 -2.751,1.843 -2.356,2.167 -1.905,2.408 -1.597,2.502 -1.6,2.5 -1,2.5
  Top Layer region: 1,-2.5 1,2.5 1.601,2.5 1.905,2.408 2.356,2.167 2.751,1.843 3.075,1.448 3.316,0.997 3.464,0.509 3.514,0 3.464,-0.509 3.316,-0.997 3.075,-1.448 2.751,-1.843 2.356,-2.167 1.905,-2.408 1.597,-2.502 1.6,-2.5 1,-2.5
  silkscreen extent -1.5,-3.1 1.5,3.1
LED0805A_L210W100H60 [mm]
  rect 0.85x1 smd: 1(1.2,0) 2(-1.2,0)
  silkscreen extent -0.8,-0.3 1.83,1.33
LEMS_P20_M12 [mm]
  oval 2.3x2 smd: 1(-10,0) 2(10,0)
  silkscreen extent -13.3,-8.2 13.3,8.2
LGA16_P50L30W30H08 [mm]
  rect 0.75x0.24 smd: 1(-1.55,1) 2(-1.55,0.5) 3(-1.55,0) 4(-1.55,-0.5) 5(-1.55,-1) 9(1.55,-1) 10(1.55,-0.5) 11(1.55,0) 12(1.55,0.5) 13(1.55,1)
  rect 0.24x0.75 smd: 6(-0.5,-1.55) 7(0,-1.55) 8(0.5,-1.55) 14(0.5,1.55) 15(0,1.55) 16(-0.5,1.55)
  silkscreen extent -2.05,-1.5 1.5,1.9
PAD_M3_D350_450 [mm]
  round 4.5 / inner round 4.2 / far side round 4.5 hole 2.4 unplated: 1(0,0)
  silkscreen extent -2.5,-2.5 2.5,2.5
PAD_MARK_D1-2 [mm]
  round 1 / inner round 0 / far side round 1 all layers, no hole mask+0.5: 1(0,0)
  Top Layer keep-out region: 1.009,0 0.974,0.261 0.873,0.504 0.713,0.713 0.504,0.873 0.261,0.974 0,1.009 -0.261,0.974 -0.504,0.873 -0.713,0.713 -0.873,0.504 -0.974,0.261 -1.009,0 -0.974,-0.261 -0.873,-0.504 -0.713,-0.713 -0.504,-0.873 -0.261,-0.974 0,-1.009 0.261,-0.974 0.504,-0.873 0.713,-0.713 0.873,-0.504 0.974,-0.261 1.009,0
  Top Layer keep-out region: 1.21,0 1.169,0.313 1.048,0.605 0.856,0.856 0.605,1.048 0.313,1.169 0,1.21 -0.313,1.169 -0.605,1.048 -0.856,0.856 -1.048,0.605 -1.169,0.313 -1.21,0 -1.169,-0.313 -1.048,-0.605 -0.856,-0.856 -0.605,-1.048 -0.313,-1.169 0,-1.21 0.313,-1.169 0.605,-1.048 0.856,-0.856 1.048,-0.605 1.169,-0.313 1.21,0
  Bottom Layer keep-out region: 1.009,0 0.974,0.261 0.873,0.504 0.713,0.713 0.504,0.873 0.261,0.974 0,1.009 -0.261,0.974 -0.504,0.873 -0.713,0.713 -0.873,0.504 -0.974,0.261 -1.009,0 -0.974,-0.261 -0.873,-0.504 -0.713,-0.713 -0.504,-0.873 -0.261,-0.974 0,-1.009 0.261,-0.974 0.504,-0.873 0.713,-0.713 0.873,-0.504 0.974,-0.261 1.009,0
  Bottom Layer keep-out region: 1.21,0 1.169,0.313 1.048,0.605 0.856,0.856 0.605,1.048 0.313,1.169 0,1.21 -0.313,1.169 -0.605,1.048 -0.856,0.856 -1.048,0.605 -1.169,0.313 -1.21,0 -1.169,-0.313 -1.048,-0.605 -0.856,-0.856 -0.605,-1.048 -0.313,-1.169 0,-1.21 0.313,-1.169 0.605,-1.048 0.856,-0.856 1.048,-0.605 1.169,-0.313 1.21,0
PAD_TP_D1.2 [mm]
  round 0.9 hole 0.6: 1(0,0)
  silkscreen extent -0.65,-0.65 0.65,0.65
SO8N_P127L50W40W62H17 [mm]
  rect 1.6x0.55 smd: 1(-2.75,1.905)
  oval 1.6x0.55 smd: 2(-2.75,0.635) 3(-2.75,-0.635) 4(-2.75,-1.905) 5(2.75,-1.905) 6(2.75,-0.635) 7(2.75,0.635) 8(2.75,1.905)
  silkscreen extent -3.38,-2.5 1.45,2.82
SON6_P65L21W21H8_DRV [mm]
  rect 0.72x0.32 smd: 1(-1.15,0.65) 2(-1.15,0) 3(-1.15,-0.65) 4(1.15,-0.65) 5(1.15,0) 6(1.15,0.65)
  round 0.4 smd: 7(0,0)
  Top Layer region: -0.4,0.6 -0.2,0.8 0.2,0.804 0.278,0.788 0.344,0.744 0.388,0.678 0.404,0.6 0.4,0.6 0.404,-0.6 0.388,-0.678 0.344,-0.744 0.278,-0.788 0.2,-0.804 0.2,-0.8 -0.2,-0.804 -0.278,-0.788 -0.344,-0.744 -0.388,-0.678 -0.404,-0.6 -0.4,-0.6 -0.4,0.6
  silkscreen extent -2.07,-1.05 1.05,1.45
SON10_P50L32W32H10_DRC [mm]
  rect 0.8x0.26 smd: 1(-1.55,1) 2(-1.55,0.5) 3(-1.55,0) 4(-1.55,-0.5) 5(-1.55,-1) 6(1.55,-1) 7(1.55,-0.5) 8(1.55,0) 9(1.55,0.5) 10(1.55,1)
  round 0.4 smd: 11(0,0)
  rect 0.3x0.75 smd: 12(-0.25,1.25) 13(0.25,1.25) 14(-0.25,-1.25) 15(0.25,-1.25)
  Top Layer region: -0.65,0.9 -0.45,1.1 0.45,1.104 0.528,1.088 0.594,1.044 0.638,0.978 0.654,0.9 0.65,0.9 0.654,-0.9 0.638,-0.978 0.594,-1.044 0.528,-1.088 0.45,-1.104 0.45,-1.1 -0.45,-1.104 -0.528,-1.088 -0.594,-1.044 -0.638,-0.978 -0.654,-0.9 -0.65,-0.9 -0.65,0.9
  silkscreen extent -2.65,-1.6 1.6,1.6
SOT-23L [mm]
  rect 1.03x0.77 smd: 1(-1.05,0.95) 2(-1.05,-0.95)
  oval 1.18x0.75 smd: 3(1.15,0)
  silkscreen extent -1.57,-1.46 0.87,1.87
SW_L40W30H25_MPTFP [mm]
  rect 1.5x2.3 smd: 1(-2.15,0) 2(2.15,0)
  silkscreen extent -2.65,-1.45 1.95,1.69
TDFN8_P65L30W30H08 [mm]
  rect 0.78x0.33 smd: 1(-1.6,0.975) 2(-1.6,0.325) 3(-1.6,-0.325) 4(-1.6,-0.975) 5(1.6,-0.975) 6(1.6,-0.325) 7(1.6,0.325) 8(1.6,0.975)
  round 0.4 smd: 9(0,0)
  Top Layer region: -0.675,0.6 -0.475,0.8 0.475,0.804 0.553,0.788 0.619,0.744 0.663,0.678 0.679,0.6 0.675,0.6 0.679,-0.6 0.663,-0.678 0.619,-0.744 0.553,-0.788 0.475,-0.804 0.475,-0.8 -0.475,-0.804 -0.553,-0.788 -0.619,-0.744 -0.663,-0.678 -0.679,-0.6 -0.675,-0.6 -0.675,0.6
  silkscreen extent -2.57,-1.5 1.5,1.5
UDFN10_SON_P50L25W10H55 [mm]
  rect 0.66x0.25 smd: 1(-0.5,1) 2(-0.5,0.5) 4(-0.5,-0.5) 5(-0.5,-1) 6(0.5,-1) 7(0.5,-0.5) 9(0.5,0.5) 10(0.5,1)
  rect 0.66x0.3 smd: 3(-0.5,0) 8(0.5,0)
  silkscreen extent -1.47,-1.32 0.48,1.32
USB3_P65L130W51H28_TH [mm]
  rect 0.35x1.58 smd: 1(-1.3,4.35) 2(-0.65,4.35) 3(0,4.35) 4(0.65,4.35) 5(1.3,4.35) 6(5.4,4.35) 7(6.05,4.35) 8(6.7,4.35) 9(7.35,4.35) 10(8,4.35)
  rect 1.3x2 hole 0.65 slot 1.4 at 0 deg: 11(-3.6,1.45) 12(8.95,1.45)
  rect 2.8x1.3 hole 0.6 slot 2.4 at 0 deg: 13(3.5,4.4)
  rect 1.8x1.9 smd: 14(1.2,1.45) 15(4,1.45)
  rect 3.3x2.2 smd: 16(9.2,1.45)
  rect 3x2.2 smd: 17(-4.1,1.45)
  silkscreen extent -3.6,-1.3 8.95,5.1
WAFER4_P1.25L6.25W3.4H4.3 [mm]
  oval 0.9x1.5 / inner round 0.9 / far side oval 0.95x1.5 hole 0.65: 1(0,0) 2(1.25,0) 3(2.5,0) 4(3.75,0)
  silkscreen extent -1.31,-2.6 5.05,1.35
XTAL_3225 [mm]
  rect 1.25x1 smd: 1(-1.1,-0.85) 2(1.1,-0.85) 3(1.1,0.85) 4(-1.1,0.85)
  silkscreen extent -2,-2.08 2,1.66
XTAL_3225A [mm]
  rect 1.25x1 smd: 1(-1.1,-0.85) 2(1.1,-0.85) 3(1.1,0.85) 4(-1.1,0.85)
  silkscreen extent -2.53,-1.66 2,1.66

## Via types
v1: diameter 15, hole 7.87, Top Layer to Bottom Layer, 163 vias
v2: diameter 19, hole 9.84, Top Layer to Bottom Layer, 131 vias
v3: diameter 23.62, hole 13.78, Top Layer to Bottom Layer, 77 vias
v4: diameter 27.95, hole 15.75, Top Layer to Bottom Layer, 17 vias
v5: diameter 0, hole 0, Top Layer to Bottom Layer, 3 vias
v6: diameter 20.47, hole 11.81, Top Layer to Bottom Layer, 2 vias
v7: diameter 35, hole 19.68, Top Layer to Bottom Layer, 2 vias

## Nets (pads, with @x,y where several pads share a name; then routed paths per layer and width w, separated by ;. In a path a pad name is that pad's centre, name@x,y a point inside that pad or via, vN(x,y) a via of type N, cw(c..) or ccw(c..) an arc to the next point about the centre after c; other vN are vias at no path point)
1V2: C2.1 C3.2 C4.2 C5.2 C6.2 C8.2 C9.2 C10.2 C11.2 C56.1 C94.2 C95.2 C97.2 C98.2 FB1.2 FB2.2 FB3.2 R56.1 R57.1 U1.B10 U1.C3 U1.E9 U1.F11 U1.H1 U1.J11 U1.L5 U1.L7 U13.5 U13.6 | length 5116.9
  Top Layer w5.6: v1(-184.78,157.54) U1.F11@-157.48,157.48
  Top Layer w11.02: R56.1@322.1,729.28 322.1,731.5 340.14,749.54 ; 340.14,749.54 cw(c353.78,735.9) 353.78,755.19 448.39,755.19 cw(c448.39,735.9) 462.03,749.54 ; R57.1@436.99,667.75 462.24,693 ccw(c448.6,706.64) 467.89,706.64 467.89,735.68 ccw(c448.6,735.68) 462.24,749.33 462.03,749.54
  Top Layer w12: C4.2@-263.3,250.64 -256.42,251.55 -180.03,251.55 ; v1(-217.25,275.22) -203.61,275.22 -180.03,251.63 -180.03,251.55 ; v1(-203.93,157.74) U1.F11@-157.48,157.48 ; U1.J11@-157.48,251.97 -174.48,251.97 -180.03,251.55 ; U1.B10@-125.98,31.5 v1(-111.55,15.84) ; v1(-110.24,111.13) U1.E9@-94.49,125.98 ; v1(-48.14,333.32) U1.L7@-31.5,314.96 ; U1.L5@31.5,314.96 31.41,336.99 32.87,336.99 v1(32.9,335.05) ; U1.C3@94.49,62.99 108.92,45.91 v1(109.4,45.84) ; U1.H1@157.48,220.47 188.47,220.47 v1(197.69,224.34) ; v3(325.46,480.93) 325.46,509.96 C2.1@318.65,512.57 ; U13.5@343.58,596.83 362.56,596.83 C98.2@396.83,562.56 ; U13.6@343.58,622.42 384.97,622.42 C56.1@396.83,610.56 ; v3(351.95,488.94) 330.79,510.43 330.79,520.35 C2.1@319.96,520.35 ; R57.1@436.99,667.75 436.99,661.34 396.83,621.18 C56.1@396.83,610.56 ; v3@299.15,492.64 C2.1@318.65,512.57 ; v3@299.15,492.64 v3(299.64,481.38) 299.64,493.56 ; v3@299.15,492.64 298.56,481.53 298.56,492.48 299.64,493.56 ; 299.64,493.56 C2.1@318.65,512.57 ; C2.1@318.65,512.57 318.65,515.25 319.96,516.56 C2.1@319.96,520.35 ; C2.1@319.96,520.35 320.74,519.57 353.85,519.57 C98.2@396.83,562.56 ; C98.2@396.83,562.56 C56.1@396.83,610.56
  Top Layer w19.68: v3(227.84,-48.13) 247.92,-48.13 FB2.2@264.88,-31.16
  Mid-Layer 2 w12: v1(-217.25,275.22) -233.06,291.03 -233.06,300.53 -251.71,319.18 -251.71,404.38 -217.24,438.85 -126.38,438.85 -48.14,360.62 v1(-48.14,333.32)
  Mid-Layer 3 w12: v1(-217.25,275.22) -195.23,253.2 -195.23,238.64 ; v1(-203.93,157.74) -203.93,185.69 -195.23,194.39 -195.23,238.64 ; v1(-111.55,15.84) -111.55,43.72 -129.11,61.28 -129.11,92.26 v1(-110.24,111.13) ; v1(32.9,335.05) 32.87,336.99 v1@31.4,339.59 ; v1(109.4,45.84) 108.92,45.84 108.92,10.58 ; v1(197.69,224.34) 196.62,226.24 291.47,321.09 ; v3(227.84,-48.13) 291.47,15.5 291.47,321.09 ; v3(299.64,481.38) 299.64,366.81 ; -195.23,238.64 -107.43,238.64 -69.79,276.28 -69.79,311.67 v1(-48.14,333.32) -22.34,359.13 286.63,359.13 288.95,354.29 ; 18,9.74 35.64,-7.91 90.43,-7.91 108.92,10.58 ; 18,9.74 18,6.79 32.92,-8.13 91.33,-8.13 108.92,9.45 108.92,10.58 ; 18,9.74 18,326.19 v1@31.4,339.59 ; v1@31.4,339.59 58.61,366.81 299.64,366.81 ; 288.95,354.29 299.64,364.98 299.64,366.81 ; 288.95,354.29 291.47,351.77 291.47,321.09
  Bottom Layer w12: C97.2@-247.02,244.4 C97.2@-246.85,238.01 -247.02,242.12 -257.99,231.16 -257.99,185.97 -246.85,174.84 C95.2@-246.85,174.52 -230.07,157.74 v1(-203.93,157.74) ; -224.9,266.52 -224.9,267.56 v1(-217.25,275.22) ; FB1.2@-209.27,-73.8 FB1.2@-207.25,-74.37 ; C9.2@-193.48,174.52 -191.87,172.91 C9.2@-191.87,169.79 ; v1(-184.78,157.54) -184.78,160.19 -191.87,167.28 C9.2@-191.87,169.79 ; C6.2@-154.31,-13.88 C6.2@-154.31,-12.6 ; v1(-110.24,111.13) -130.45,111.13 -136.69,104.89 -167.73,104.89 -189.86,127.02 C10.2@-189.86,128.99 -189.86,167.78 C9.2@-191.87,169.79 ; C5.2@73.31,362.86 C5.2@81.75,369.74 C94.2@81.75,414.12 ; v1(109.4,45.84) 108.92,45.84 108.92,7.35 185.56,-69.29 185.56,-94.7 ; FB3.2@143.35,-107.03 185.3,-100.97 C11.2@198.21,-107.03 ; 179.29,-100.97 185.56,-94.7 ; v1(197.69,224.34) 202.56,229.22 C3.2@202.56,263.56 ; v3(227.84,-48.13) 229.38,-48.56 189.69,-88.25 C11.2@198.21,-107.03 ; v3(299.64,481.38) 307.21,488.94 v3@325.46,488.94 ; v3(325.46,480.93) v3@325.46,488.94 ; v3(351.95,488.94) v3@325.46,488.94 ; 185.56,-94.7 187.53,-92.73 C11.2@198.21,-107.03
  Bottom Layer w19.68: C8.2@-258.5,-73.8 FB1.2@-209.27,-73.8 ; C97.2@-247.02,244.4 -224.9,266.52 ; FB1.2@-207.25,-74.37 -150.18,-17.3 C6.2@-150.18,-11 ; C6.2@-154.31,-13.88 C6.2@-150.18,-11 ; v1(-111.55,15.84) C6.2@-150.18,-11 ; FB3.2@143.35,-107.03 179.29,-100.97
  Bottom Layer w23.62: v1(32.9,335.05) 32.87,336.99 31.4,340.06 C5.2@73.31,362.86
1V2_AVDD: C18.1 C19.2 FB1.1 U1.A7 | length 311.1
  Top Layer w12: v2(-44.61,-26.68) U1.A7@-31.5,0
  Bottom Layer w12: FB1.1@-154.15,-73.8 C19.2@-94.46,-77.78 ; C18.1@-118.8,-166.02 -99.37,-82.68 C19.2@-94.46,-77.78 ; C19.2@-105.6,-70.61 -91.41,-68.53 ; C19.2@-94.35,-77.66 C19.2@-94.46,-77.78 ; v5(-68.78,-106.35) -68.78,-97.58 -91.52,-74.83 ; v2(-44.61,-26.68) -87.87,-67.38 -91.41,-68.53 ; C19.2@-94.46,-77.78 -91.52,-74.83 ; -91.52,-74.83 -91.52,-72.13 -91.41,-72.02 -91.41,-68.53
1V2_U3RX: C20.1 C21.2 FB2.1 U1.A2 | length 345.2
  Top Layer w12: U1.A2@125.98,0 218.35,-92.37 265.82,-92.37 C21.2@268.31,-92.52 264,-89.26 315,-38.26 FB2.1@320,-31.16
  Top Layer w23.62: C21.2@268.31,-92.52 272.63,-89.26 C20.1@272.64,-162.25
1V2_U3TX: C30.1 C31.2 FB3.1 U1.B5 | length 548.4
  Top Layer w12: U1.B5@31.5,31.5 v1(47.24,15.75)
  Bottom Layer w12: 72.53,-92.06 C30.1@86.31,-180.65 ; v5(76.87,-244.1) 76.87,-122.6 70.22,-94.39 72.42,-94.39 C30.1@86.31,-180.65 ; FB3.1@88.23,-107.03 77.85,-172.68 C30.1@86.31,-180.65
  Bottom Layer w19.68: v1(47.24,15.75) 47.24,-14.51 C31.2@72.53,-39.8
  Bottom Layer w21.65: 72.53,-92.06 C31.2@72.53,-39.8
3V3: C1.2 C12.2 C13.2 C14.2 C15.2 C16.2 C17.2 C22.2 C23.2 C24.2 C25.2 C26.2 C27.2 C28.2 C29.2 C33.2 C34.2 C51.2 C55.1 C58.2 C59.2 C60.2 FB4.2 Q4.3 R1.1 R2.2 R3.1 R7.2 R8.2 R9.1 R10.2 R11.2 R13.1 R14.1 R15.1 R25.1 R26.1 R44.2 R59.2 S1.1 T7.1 U1.B1 U1.B6 U1.C11 U1.E3 U1.F1 U1.H11 U1.L9 U2.8 U4.9 U4.10 U7.1 U7.4 U9.1 U9.16 U13.2 U13.3 U13.4 | length 5392.3
  Top Layer w5.6: v3(-224.96,207.47) -200.27,220.47
  Top Layer w6.8: -192,222.09 -157.48,222.09 U1.H11@-157.48,220.47
  Top Layer w12: v3(-455.83,-123.79) -427.97,-151.66 C51.2@-427.97,-166.89 -416.55,-156.56 -416.55,-152.29 v3(-424.89,-140.96) -412.09,-148.22 -412.09,-277.67 FB4.2@-417.64,-277.67 -426.98,-268.33 -426.98,-217.81 C25.2@-427.16,-217.63 -416.63,-201.48 ; U9.16@-378.47,506.28 -361.35,506.28 -344.18,489.12 -344.18,471.86 C58.2@-333.3,459.95 ; U7.4@-360.9,-202.28 U7.4@-360.9,-190.52 ; U9.1@-337.13,527.93 -334.39,511.15 -334.39,465.39 C58.2@-333.3,459.95 ; v6(-304.85,471.93) -333.3,471.93 C58.2@-333.3,459.95 ; C12.2@-260.88,150.34 -263.3,153.66 C12.2@-263.3,158.93 ; R25.1@-210.22,518.71 -210.36,518.58 R26.1@-210.36,465.15 v6(-188.28,490.34) ; R44.2@-210.22,639.23 -210.22,629.96 v1(-190.49,629.96) ; -192,222.09 -200.27,220.47 -200.76,220.47 -252.85,168.38 -253.85,168.38 C12.2@-263.3,158.93 ; U1.H11@-157.48,220.47 -166.31,229.3 -207.46,229.3 -242.42,194.34 C13.2@-263.3,194.34 -262.39,195.25 -262.39,192.3 -263.3,191.39 C12.2@-263.3,158.93 ; v1(-107.16,341.66) -107.54,340.88 U1.L9@-94.49,314.96 ; v1(-15.29,14.55) U1.B6@0,31.5 ; U1.E3@94.49,125.98 110.18,112.37 v1(109.23,111.27) ; U1.B1@157.48,31.5 v1(177.99,13.52) ; U1.F1@157.48,157.48 186,157.48 211.6,131.88 220.01,131.88 220.48,131.41 v1(220.97,131.41) 259.44,131.41 C60.2@272.96,117.9 ; R10.2@169.24,523.52 169.24,571.92 C33.2@168.45,572.7 ; v3(173.99,712.77) 172.01,708.9 C16.2@168.45,680.64 ; v3(202.41,712.21) 202.41,711.04 C16.2@168.45,680.64 ; U13.4@217.6,596.83 196.13,596.83 C33.2@168.45,572.7 ; U13.3@217.6,622.42 217.29,626.67 C55.1@168.45,626.67 ; U13.2@217.6,648.01 172.01,648.01 C16.2@168.45,680.64 ; R7.2@272.17,65.57 273.17,75.33 C60.2@272.96,117.9 ; C60.2@272.95,119.41 C60.2@272.96,117.9 ; R8.2@313.11,230.37 310.56,228.64 315.11,224.1 338.48,224.1 356.28,206.3 v1(383.19,206.3) 395.76,185.78 395.76,179.18 R11.2@400.79,179.18 ; C33.2@168.45,572.7 C55.1@168.45,626.67 ; C55.1@168.45,626.67 C16.2@168.45,680.64
  Top Layer w13.78: v3(-195.81,38.48) U1.C11@-157.48,62.99
  Top Layer w20: T7.1@-1163.07,633.11 -1163.07,667.02 cw(c-1128.07,667.02) -1152.82,691.76 S1.1@-1112.61,731.97
  Top Layer w21.65: U7.4@-360.9,-190.52 U7.1@-293.97,-190.52
  Top Layer w23.62: C51.2@-427.97,-166.89 -416.63,-201.48 ; C25.2@-427.16,-217.63 U7.4@-360.9,-202.28
  Mid-Layer 2 w12: v1(-15.29,14.55) -14.63,13.89 -1.37,13.89 72.24,-59.72 ; v3(95.14,-308.32) 84.54,-297.73 ; 72.24,-59.72 cw(c57.39,-74.57) 78.39,-74.57 ; 72.24,-59.72 cw(c57.39,-74.57) 78.39,-74.57 ; 72.24,-59.72 cw(c57.39,-74.57) 78.39,-74.57 ; 72.24,-59.72 cw(c57.39,-74.57) 78.39,-74.57 ; 78.39,-282.88 ccw(c99.39,-282.88) 84.54,-297.73 ; 78.39,-282.88 ccw(c99.39,-282.88) 84.54,-297.73 ; 78.39,-282.88 ccw(c99.39,-282.88) 84.54,-297.73 ; 78.39,-282.88 ccw(c99.39,-282.88) 84.54,-297.73 ; 78.39,-282.88 78.39,-74.57
  Mid-Layer 3 w12: v3(-195.81,38.48) -195.81,-49.86 -35.71,-49.86 -15.29,-29.44 v1(-15.29,14.55) ; v1(109.23,111.27) 110.35,112.23 136.86,138.74 173.35,138.74 ; v1(177.99,13.52) 200.35,35.89 200.35,69.74 173.35,96.74 173.35,138.74 ; v1(220.97,131.41) 173.35,138.74
  Mid-Layer 3 w15: v3(-224.96,207.47) -256.78,239.3 -256.78,342.38 -231.65,367.51 -133.01,367.51 v1(-107.16,341.66)
  Bottom Layer w12: R59.2@-1168.63,517.25 -1169.42,518.04 C22.2@-1169.42,585.2 ; T7.1@-1163.07,633.11 -1163.07,591.55 C22.2@-1169.42,585.2 ; Q4.3@-1104.66,616.08 -1110.72,610.03 -1144.59,610.03 C22.2@-1169.42,585.2 ; R14.1@-433.22,-359.56 -424.89,-352.12 v3(-424.89,-140.96) ; C29.2@-246.85,18.91 -198,33.74 v3(-195.81,38.48) -227.29,69.95 C24.2@-246.85,69.95 ; U4.10@-205.5,-397.73 -200.02,-397.73 -200.02,-407.56 ; U4.9@-205.5,-378.05 -198.61,-378.05 -150.17,-426.49 C59.2@-150.17,-476.51 C17.2@-195.39,-476.51 ; -200.02,-423.19 R15.1@-150.95,-423.19 ; C26.2@-193.69,234.57 C26.2@-193.48,238.01 ; C34.2@-162.02,-541.97 -150.37,-533.31 -143.8,-521.97 -137.61,-533.31 -137.61,-559.4 -124.53,-546.32 ; v3(-129.68,-519.23) -145.2,-519.23 -145.52,-551.17 -146.92,-546.32 -124.53,-546.32 ; C23.2@-121.31,369.74 -107.74,356.17 -107.74,341.66 v1(-107.16,341.66) ; v3(-101.38,-523.16) -124.53,-546.32 ; v3(95.14,-308.32) 96.17,-309.35 R2.2@126.03,-309.35 126.03,-306.9 166.19,-266.74 166.19,-249.69 182.05,-249.69 ccw(c182.05,-228.69) 196.9,-243.54 211.69,-228.75 U2.8@232.36,-228.75 ; v1(109.23,111.27) 110.35,112.23 134.12,136 134.12,149.58 157.31,172.77 C14.2@163.19,174.71 ; v3(173.99,712.77) 236.71,712.77 C28.2@236.71,696.14 236.05,695.48 219.14,695.48 v3(202.41,712.21) ; v1(177.99,13.52) 222.34,13.52 265.66,-29.8 C27.2@265.66,-41 264.87,-40.21 R13.1@264.87,12.07 ; C15.2@579.49,-188.9 v3@579.49,-212.58 ; v3(579.99,-213.82) 579.49,-213.32 v3@579.49,-212.58 ; R3.1@580.28,-294.24 R1.1@580.28,-241.26 580.28,-212.58 v3@579.49,-212.58
  Bottom Layer w19.68: v3(-224.96,207.47) C26.2@-193.69,234.57 ; -200.02,-423.19 -200.02,-407.56
  Bottom Layer w23.62: C34.2@-162.02,-541.97 -150.37,-533.31 -150.37,-479.75 C59.2@-150.17,-476.51 ; C34.2@-143.8,-521.97 v3(-70.79,-521.97)
  other v3: -431.13,-115.07
5V0: 5V0.1 C7.2 C32.1 C36.1 C37.2 C40.1 C43.2 C53.2 C54.2 C65.2 C66.2 C68.2 C78.2 C79.2 J6.1 J6.2 J6.3 L2.2 P1.1 R5.1 RJ.2 RJ.4 U1.E10 U1.E11 U4.1 U4.2 U4.4 U4.5 U5.6 | length 4775.8
  Top Layer w12: v3(-424.38,-524.76) -438.98,-539.36 -438.98,-604.51 ccw(c-417.98,-604.51) -432.83,-619.36 R5.1@-413.23,-638.96 ; C40.1@-263.72,49.49 -249.45,49.49 -173.6,125.34 -156.87,125.34 -157.13,125.6 U1.E11@-157.84,125.6 ; C7.2@-262.31,93.74 -209.72,93.74 v1(-207.83,91.85) ; v1(-188.89,91.85) -188.89,94.38 -168.08,115.2 ; U1.E11@-157.48,125.98 U1.E11@-157.84,125.63 ; U1.E10@-125.98,125.98 -126.95,125.98 -137.74,115.2 -168.08,115.2 ; -168.08,115.2 -158.43,124.84 -158.43,124.95 U1.E11@-157.84,125.6
  Mid-Layer 1 w19.68: v3(-775.62,502.4) -775.62,643.62 cw(c-741.17,643.62) -765.53,667.98 P1.1@-669.29,764.21
  Mid-Layer 3 w12: v3(-424.38,-524.76) -424.38,-521.31 -368.25,-465.18 -368.25,35.05 -311.45,91.85 v1(-207.83,91.85) v1(-188.89,91.85) ; -384.09,-219.61 -331.32,-272.39 v2(-331.32,-295.88)
  Mid-Layer 3 w19.68: v3(-775.62,502.4) -775.62,236.11 -756.87,217.36 -756.87,75.84 -794.55,38.15 -794.55,-123.71 -764.43,-153.83 -557.14,-153.83 -491.36,-219.61 -384.09,-219.61
  Bottom Layer w12: v3(-927.72,-448.56) -896.98,-448.56 C78.2@-896.1,-449.44 -896.1,-449.2 -867.94,-421.03 -869.97,-418.03 -869.97,-415.12 ; U5.6@-869.97,-390.81 -869.97,-415.12 ; v3(-864.99,-436.72) -852.03,-449.68 -836.87,-449.68 C79.2@-836.63,-449.44 -836.63,-448.47 -869.97,-415.12 ; v3(-444.56,-542.31) -421.67,-565.2 -389.28,-565.2 C65.2@-389.28,-546.32 C65.2@-391.17,-544.43 ; v3(-424.38,-524.76) -404.72,-544.43 C65.2@-391.17,-544.43 ; C65.2@-393.06,-544.43 C65.2@-391.17,-544.43 ; -389.28,-276.57 -363.64,-276.57 v3(-363.64,-298.45) ; -382.65,-318.99 -382.65,-317.68 ; v2(-331.32,-295.88) -337.71,-289.49 -366.2,-289.49 -383.02,-306.31 -383.02,-314.31 -382.65,-314.68 -382.65,-317.68 ; U4.2@-327.54,-378.05 -325.58,-377.97 -334.51,-377.97 -389.74,-433.19 -389.74,-431.56 C37.2@-393.06,-423.19 ; U4.4@-327.54,-338.68 -361.65,-338.68 -382.65,-317.68 ; v1(-188.89,91.85) v1@-203.14,91.85 ; J6.2@488.19,507.87 465.33,507.87 417.62,555.58 ; J6.1@488.19,523.62 467.22,523.62 C54.2@417.62,573.21 417.62,555.58 ; L2.2@641.37,-391.7 647.34,-391.7 701.15,-391.7 704.23,-388.62 C68.2@704.23,-310.72 704.23,-251.47 C43.2@708.76,-251.47 ; v3(642.31,563.14) 640.2,561.03 588.58,561.03 588.27,560.71 550.09,560.71 511.59,522.21 C53.2@417.62,522.21 417.62,555.58 ; 5V0.1@747.58,-186.99 C43.2@722.6,-246.16 722.78,-245.99 722.78,-211.25 v4(708.76,-197.23) C43.2@708.76,-251.47 ; v4(758.18,-251.47) C43.2@708.76,-251.47 ; C36.1@-393.06,-476.51 C37.2@-393.06,-423.19 ; C36.1@-393.06,-476.51 -393.06,-473.36 -390.09,-473.36 C36.1@-389.94,-473.52 ; C36.1@-393.06,-476.51 C36.1@-389.94,-473.52 ; C37.2@-393.06,-423.19 -393.06,-425.16 -373.95,-444.28 -372.12,-444.28 U4.1@-327.54,-397.73 -326.02,-398.18 -326.02,-412.25 C36.1@-389.94,-473.52 ; v1@-203.14,91.85 v1(-207.83,91.85) -222.51,91.85 -246.85,116.19 C66.2@-246.85,122.78 -246.85,123.76 -235.05,123.76 v1@-203.14,91.85
  Bottom Layer w21.65: C65.2@-393.06,-544.43 v2(-393.06,-505.46) C36.1@-393.06,-476.51
  Bottom Layer w23.62: -389.28,-276.57 C32.1@-389.28,-228.3 ; -382.65,-318.99 U4.5@-327.54,-318.99
  other v3: -424.38,-560.74 757.34,-221 537.85,544.85 536.82,575.87
5VIN: J1.1 L2.1 RJ.1 RJ.3 | length 401.9
  Top Layer w5.6: v4(523.77,-528.36) 588.87,-463.26 604.61,-463.26 RJ.1@598.33,-477.81
  Bottom Layer w5.6: v4(523.77,-528.36) 575.54,-528.36 L2.1@641.37,-564.93 641.98,-558.48 641.98,-674.95 J1.1@622.05,-694.88
  other v4: 494.69,-515.14 551.09,-501.04 522.01,-499.71
AD0: T4.1 U1.K7 U9.4 | length 549.5
  Top Layer w5.6: U9.4@-337.13,586.99 -319.26,586.99 cw(c-319.26,577.19) -312.33,584.12 -281.85,553.64 ccw(c-274.92,560.57) -274.92,550.77 -246.05,550.77 ccw(c-246.05,560.57) -239.12,553.64 -213.93,578.83 cw(c-207,571.9) -207,581.7 T4.1@-184.75,581.7 ; v1(-45.77,300.77) U1.K7@-31.5,283.46
  Bottom Layer w5.6: T4.1@-184.75,581.7 -184.45,581.74 -56.46,453.75 cw(c-63.39,446.82) -53.59,446.82 -53.59,375.02 ccw(c-43.79,375.02) -50.72,368.09 -34.77,352.15 cw(c-41.7,345.22) -31.9,345.22 -31.9,318.69 cw(c-41.7,318.69) -34.77,311.76 v1(-45.77,300.77)
ADDR_CTL: U1.D1 U8.G7 U10.30 | length 2193.9
  Top Layer w5.6: U10.30@-1275.59,218.5 -1275.59,202.45 -1223.34,150.21 cw(c-1230.27,143.28) -1220.47,143.28 v2(-1220.47,118.11) ; v2(-457.51,254.44) -442.92,239.85 cw(c-449.85,232.92) -440.05,232.92 -440.05,-50.35 ccw(c-430.25,-50.35) -437.18,-57.28 v1(-422.48,-71.97) ; U1.D1@157.48,94.49 206.54,45.43 cw(c199.61,38.5) 209.41,38.5 v1(209.41,-21.37)
  Top Layer w6: v2(-1220.47,118.11) U8.G7@-1200.79,98.43
  Mid-Layer 1 w5.5: v2(-1220.47,118.11) -1220.47,135.29 -1236.17,150.99 -1236.17,184.34 -1220.8,199.71 -1189.08,199.71 -1168.81,219.98 -1003.35,219.98 -970.44,252.9 -514.42,252.9 -495.93,271.39 -474.46,271.39 v2(-457.51,254.44)
  Mid-Layer 1 w5.6: v1(-422.48,-71.97) -101.17,-71.97 cw(c-101.17,-81.77) -94.24,-74.84 -76.48,-92.61 ccw(c-69.55,-85.68) -69.55,-95.48 132.44,-95.48 ccw(c132.44,-85.68) 139.37,-92.61 209.41,-22.58 v1(209.41,-21.37)
ADDR_CTL_0: J6.11 R30.1 | length 122.3
  Top Layer w5.6: v1(554.6,364.91) 587.68,398 R30.1@586.49,398
  Bottom Layer w5.6: J6.11@488.19,366.14 513.2,366.14 522.13,375.08 544.43,375.08 v1(554.6,364.91)
AGND: C63.1 C64.1 C69.1 C70.1 C85.1 U8.C7 U8.F6 U10.34 U10.38 | length 732.6
  Top Layer w12: v2(-1377.72,91.7) -1365.93,91.7 cw(c-1365.93,70.7) -1351.08,85.55 -1344.27,78.74 U10.34@-1320.87,78.74 ; v2(-1358.86,-45.69) -1357.31,-47.24 U10.38@-1320.87,-47.24 ; -1162.23,-20.5 -1162.23,58.24 U8.F6@-1161.42,59.06
  Top Layer w15.75: v2(-1220.47,-78.74) U8.C7@-1200.79,-59.06 -1162.23,-20.5
  Bottom Layer w12: v2(-1379.12,-296.47) -1378.88,-296.22 C64.1@-1335.86,-296.22 ; v2(-1377.72,91.7) -1377.72,92.03 -1365.57,104.18 C69.1@-1307.51,104.18 ; v2(-1358.86,-45.69) -1358.86,-12.26 -1327.99,18.62 C85.1@-1307.51,18.62 C63.1@-1245.14,18.62 -1234.58,18.62 -1193.02,-22.94 -1189.64,-22.94 -1192.75,-27.35
  Bottom Layer w19.68: v2(-1220.47,-78.74) -1220.47,-58.25 -1189.64,-27.43 -1189.64,-22.94 ; -1192.75,-27.35 C70.1@-1148.35,-20.75
  other v2: -1562.78,-159.86 -1181.1,78.74 -1575.12,118.99 -1380.88,134.68
  other v3: -1441.24,-119.27 -1440.88,91.38